# Altium PCB SLT_4U_PEE_V100.PcbDoc (part 1 of 7)
Units mm, origin at the board's own origin, x right, y up, seen from the top; angles counter-clockwise.
Board outline 180 x 80 mm, 6 copper layers (L1 TOP, L2 GND 1, L3 SIGNAL, L4 PWR, L5 GND 2, L6 BOT), stack 1.536 mm thick; 1123 components, 840 nets, 3813 pads, 351 vias.
Unrouted connection lines stored in the file: 2064.
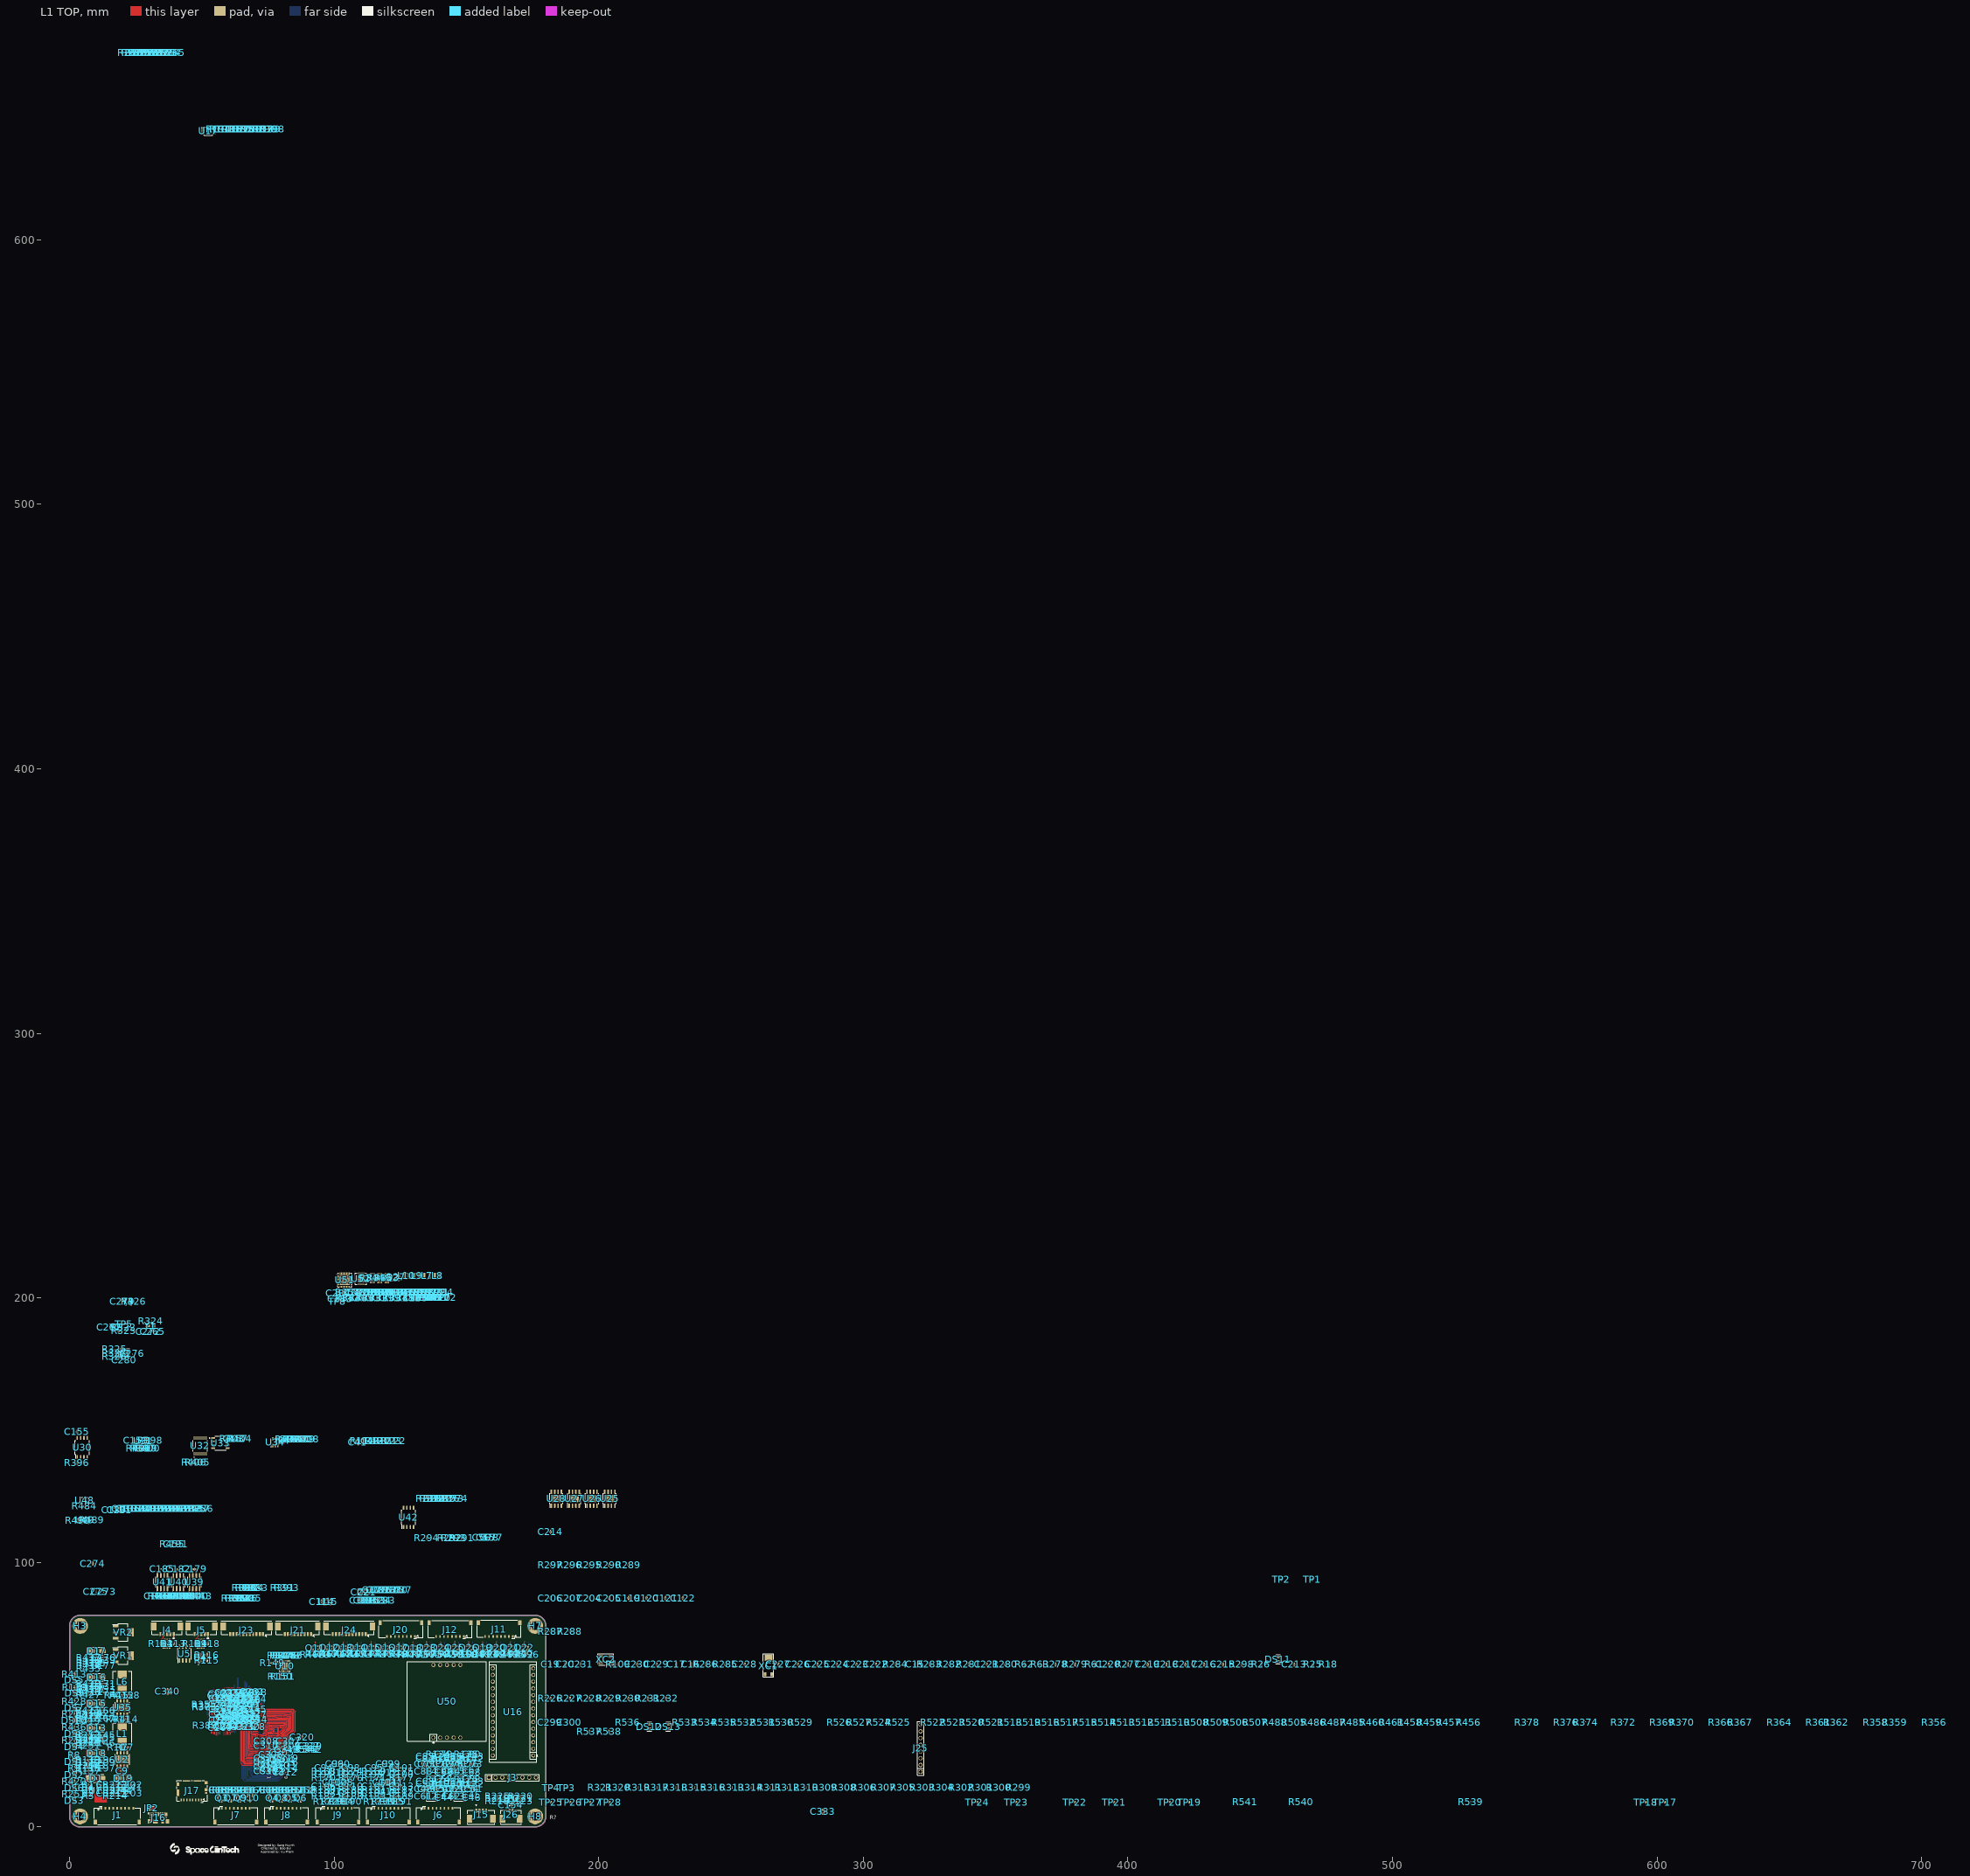
[diagram p0: L1 TOP view]
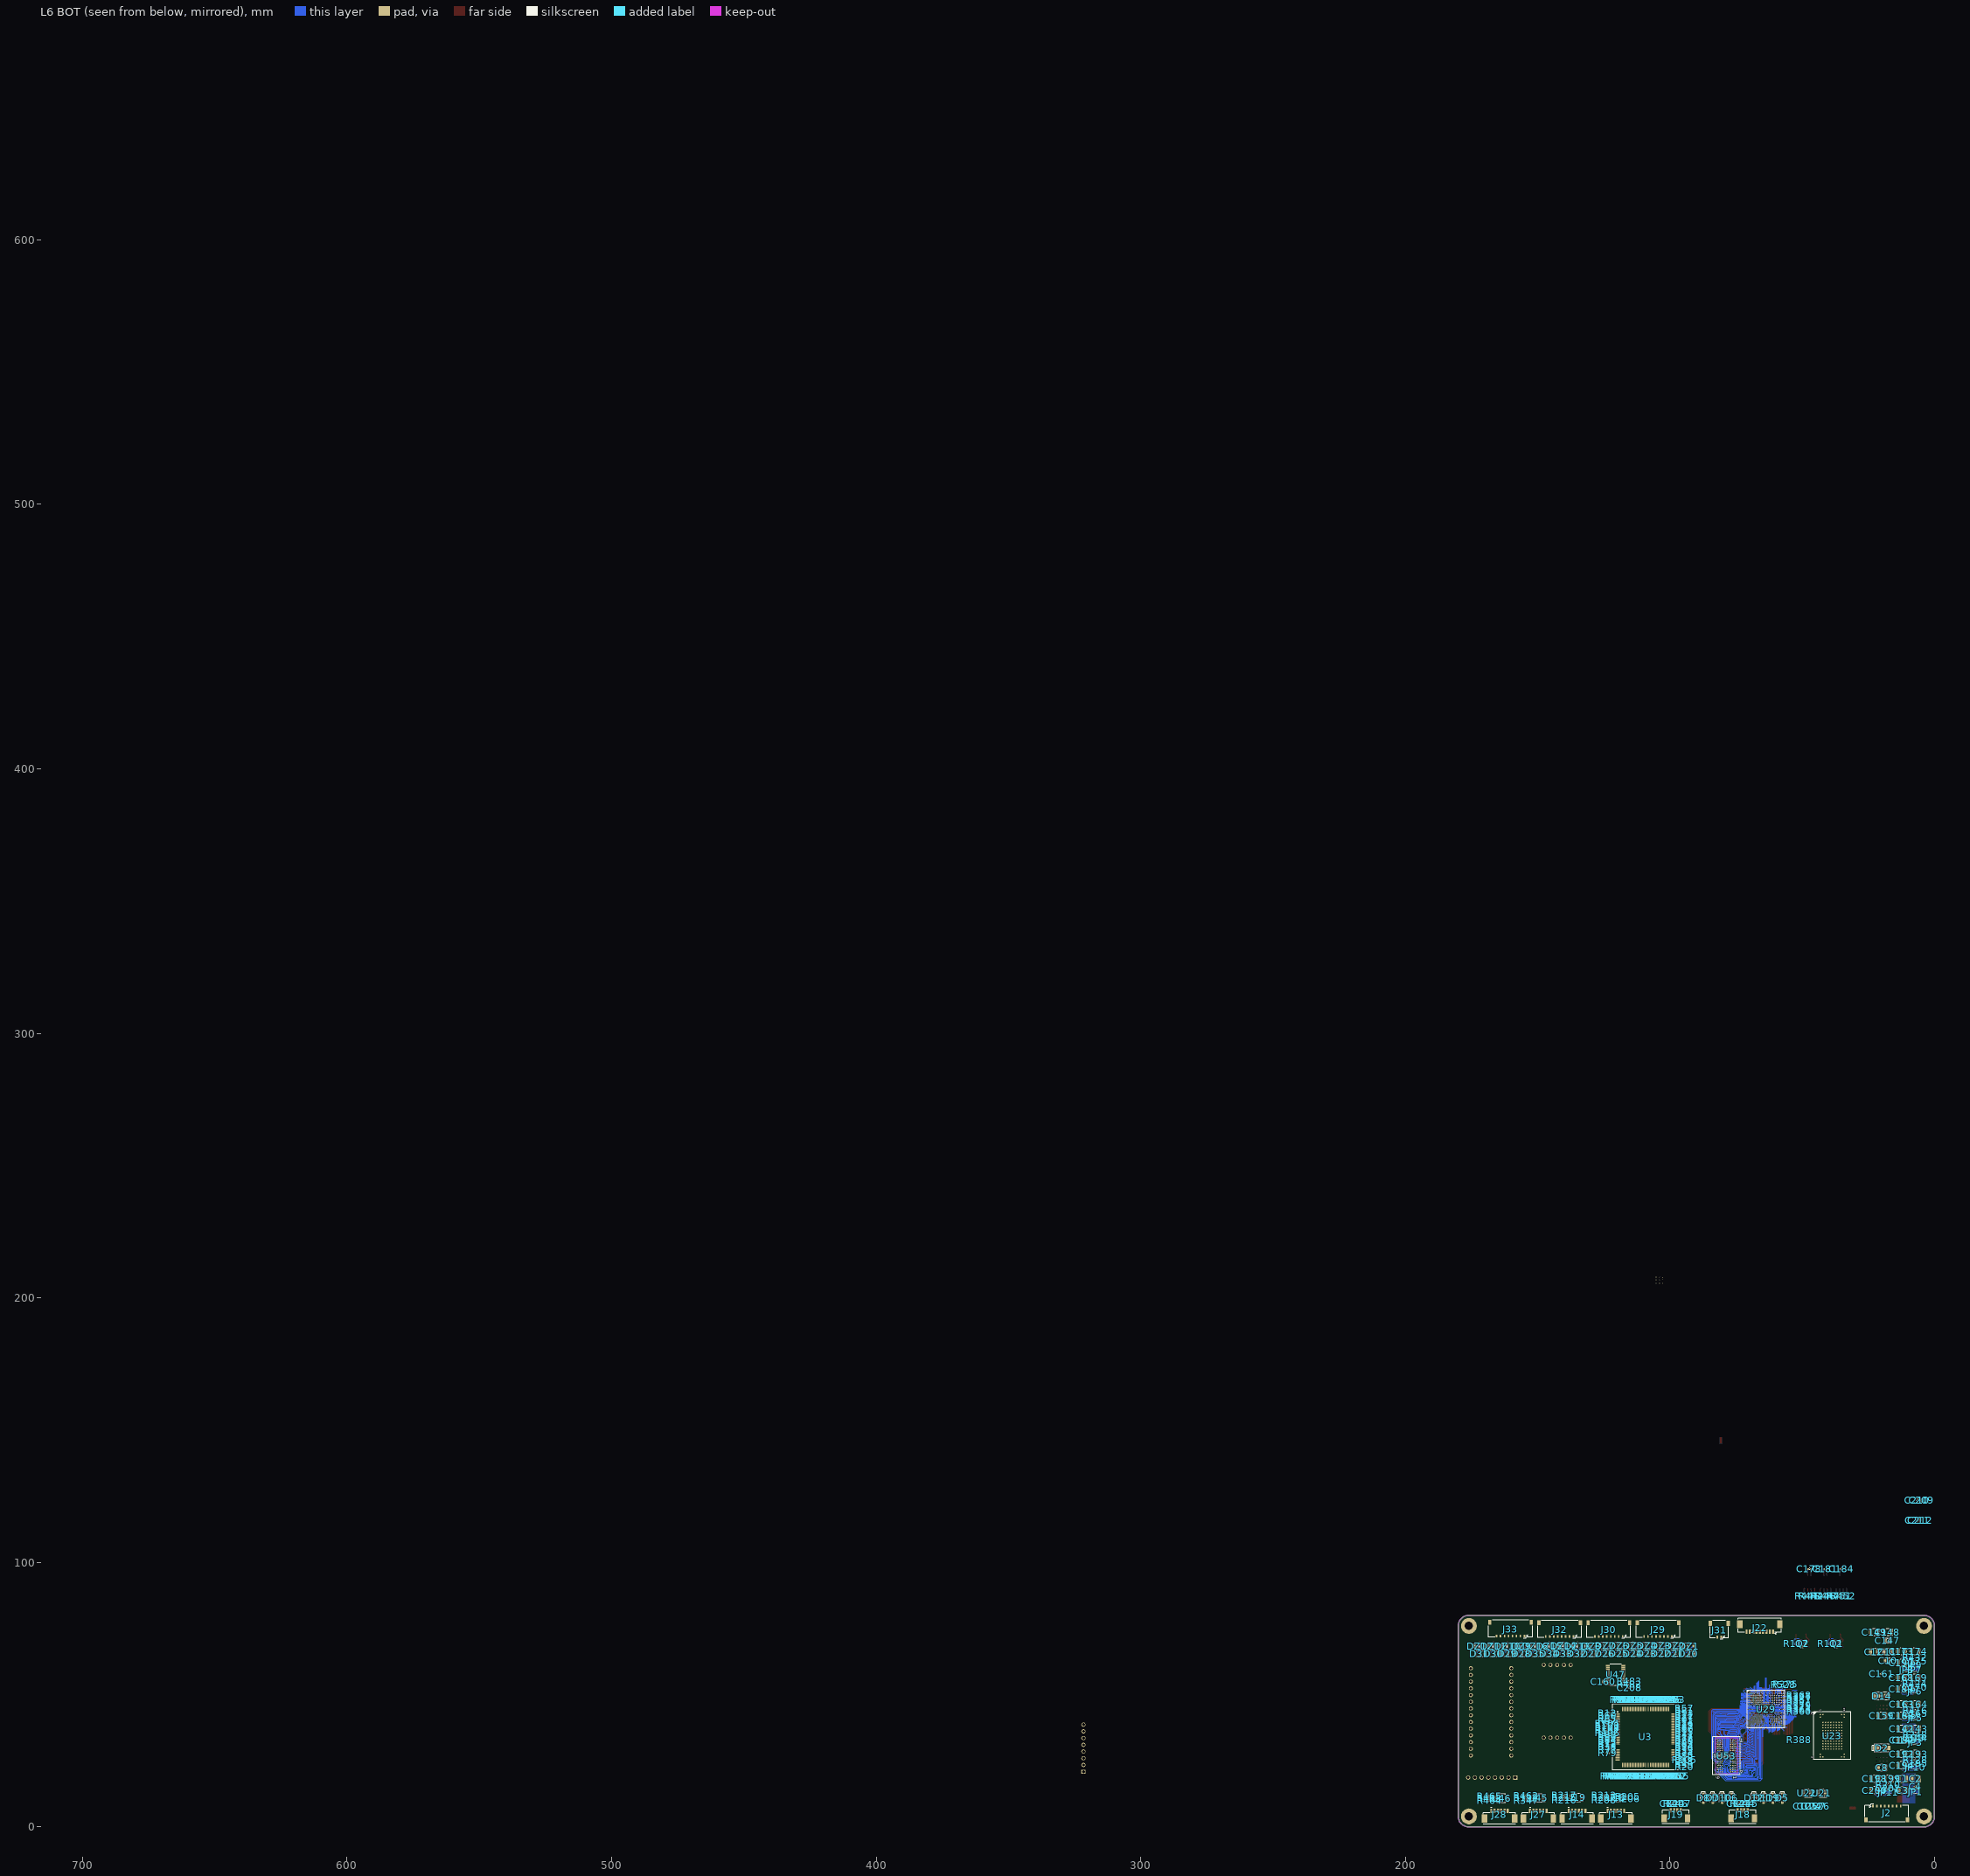
[diagram p1: L6 BOT view, seen from below]
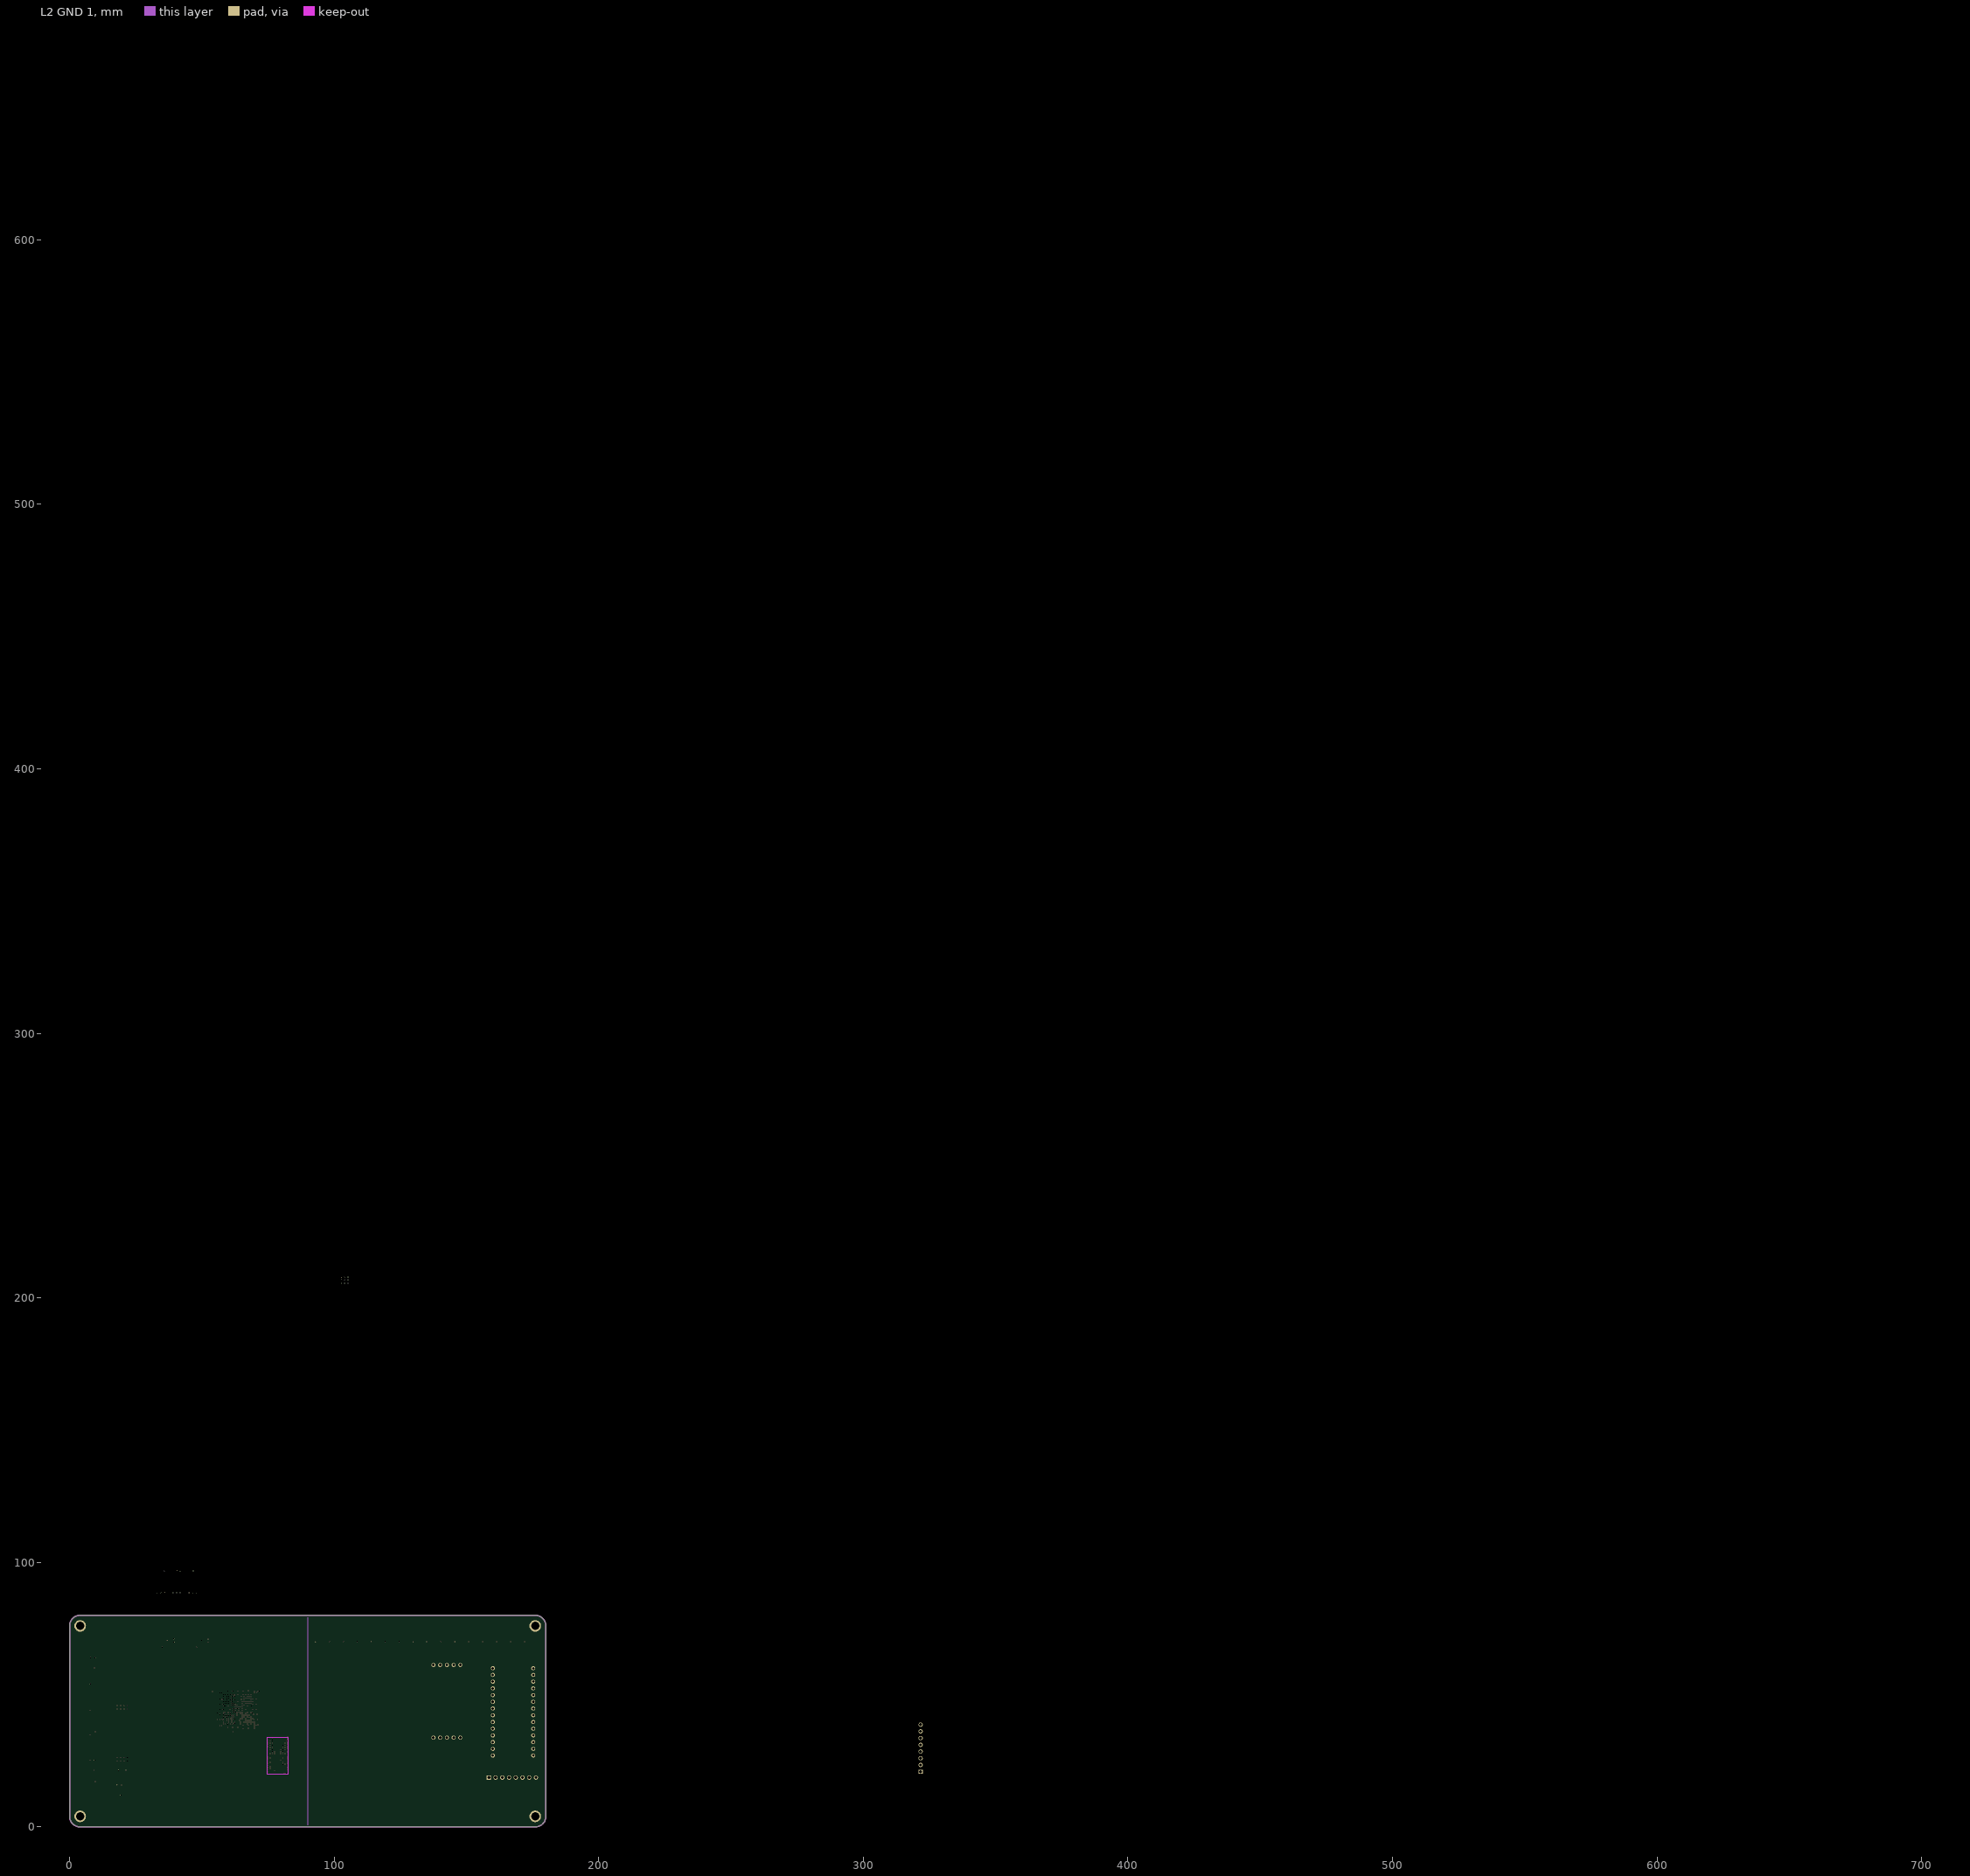
[diagram p2: L2 GND 1]

## Layer stack, top to bottom
Top Solder: solder mask 0.012, Solder Resist, Dk 4.3
L1 TOP: signal copper 0.018
Dielectric 4: core 0.1, PP-006, Dk 4.8
L2 GND 1: signal copper 0.035
Dielectric 2: prepreg 0.11, PP-006, Dk 4.1
L3 SIGNAL: signal copper 0.035
Dielectric 1: dielectric 0.94, FR-4, Dk 4.2
L4 PWR: signal copper 0.035
Dielectric 3: prepreg 0.11, PP-006, Dk 4.1
L5 GND 2: signal copper 0.035
Dielectric 5: core 0.1, PP-006, Dk 4.8
L6 BOT: signal copper 0.018
Bottom Solder: solder mask 0.012, Solder Resist, Dk 4.3

## Board outline
0,4 0,76 cw(c4,76) 4,80 176,80 cw(c176,76) 180,76 180,4 cw(c176,4) 176,0 4,0 cw(c4,4)

## Design rules (kind name [scope] priority, off if disabled: settings)
BoardOutlineClearance [All] p1: gap=0.2 ignorepadtopadclearanceinfootprint=FALSE
Clearance Clearance_HD [InNetClass('HD')] p1: gap=0.6 ignorepadtopadclearanceinfootprint=FALSE
Clearance Clearance_KEEPOUT [IsKeepOut] p2: gap=0 ignorepadtopadclearanceinfootprint=FALSE
Clearance Clearance_SOM [(WithinRoom('ROOM_SOM_1')  OR WithinRoom('ROOM_SOM_2') OR WithinRoom('ROOM_USB_2'))and OnTopLayer and not InAnyDifferentialPair] p3 off: gap=0.1 ignorepadtopadclearanceinfootprint=FALSE except(0.2: SMDPad-Fill SMDPad-Poly SMDPad-Region THPad-Fill THPad-Poly THPad-Region)
Clearance [All] p4: gap=0.1 ignorepadtopadclearanceinfootprint=FALSE except(0.125: Arc-Arc Arc-Track Track-Track Track-Via; 0.15: Arc-Fill Arc-Poly Arc-Region Track-Fill Track-Poly Track-Region SMDPad-Fill Via-Fill Via-Poly Via-Region Fill-Fill Fill-Poly Fill-Region Poly-Poly Poly-Region Region-Region; 0.2: SMDPad-Poly SMDPad-Region THPad-Fill THPad-Poly THPad-Region)
ComponentClearance [All] p1: gap=0.1 collisioncheckmode=3 verticalgap=0 showdistances=FALSE
DiffPairsRouting DiffPairs_100 [InDifferentialPairClass('DIFF100')] p1: maxlimit=0.24 minlimit=0.15 mostfreqgap=0.25 toplayer_maxgap=0.15 toplayer_prefgap=0.16 toplayer_minwidth=0.18 toplayer_maxwidth=0.18 toplayer_prefwidth=0.13 midlayer2_mingap=0.18 midlayer2_maxgap=0.18 midlayer2_minwidth=0.16 midlayer2_maxwidth=0.16 midlayer2_prefwidth=0.1 midlayer3_mingap=0.18 midlayer3_maxgap=0.18 midlayer3_minwidth=0.16 midlayer3_maxwidth=0.16 midlayer3_prefwidth=0.1 bottomlayer_maxgap=0.15 bottomlayer_prefgap=0.16 bottomlayer_minwidth=0.18 bottomlayer_maxwidth=0.18 bottomlayer_prefwidth=0.13 impedanceprofiledriven=TRUE impedanceprofileid={7DCAE575-E62E-4FB4-830B-AD6A277E48F7} impedanceprofilevalue=100.000000 filterlayerstackid={D54526CB-8AD5-485F-8D58-B8B2ED083D53} maxuncoupledlength=12.7
DiffPairsRouting DiffPairs_90 [InDifferentialPairClass('DIFF90')] p2: maxlimit=0.16 minlimit=0.15 mostfreqgap=0.16 toplayer_maxgap=0.15 toplayer_minwidth=0.22 toplayer_maxwidth=0.22 toplayer_prefwidth=0.15 midlayer2_mingap=0.16 midlayer2_minwidth=0.2 midlayer2_maxwidth=0.2 midlayer2_prefwidth=0.1 midlayer3_mingap=0.16 midlayer3_minwidth=0.2 midlayer3_maxwidth=0.2 midlayer3_prefwidth=0.1 bottomlayer_maxgap=0.15 bottomlayer_minwidth=0.22 bottomlayer_maxwidth=0.22 bottomlayer_prefwidth=0.15 impedanceprofiledriven=TRUE impedanceprofileid={482B14A7-7A58-4C4E-B4EF-1ACECD4C47D5} impedanceprofilevalue=90.000000 filterlayerstackid={D54526CB-8AD5-485F-8D58-B8B2ED083D53} maxuncoupledlength=50
FanoutControl Fanout_Small [(CompPinCount < 5)] p4: bgadir=Out bgaviamode=Closest fanoutstyle=Auto fanoutdirection=OutOnly viagrid=0.025 // Fanout_Small (Default Rule)
FanoutControl Fanout_Default [All] p5: bgadir=Out bgaviamode=Centered fanoutstyle=Auto fanoutdirection=OutOnly viagrid=0.025 // Fanout_Default (Default Rule)
HoleSize [All] p1: absolutevalues=TRUE maxlimit=5 minlimit=0.025 maxpercent=80.000 minpercent=20.000
MatchedLengths "Schematic Matched Net Lengths_7" [InNetClass('DDR-ADDR-CTL')] p1: tolerance=0.254 checknetsindiffpair=FALSE checkdiffpairvsdiffpair=TRUE checkxsignals=TRUE checkothers=TRUE
MatchedLengths "Schematic Matched Net Lengths_6" [InNetClass('DDR-LANE1')] p2: tolerance=0.254 checknetsindiffpair=FALSE checkdiffpairvsdiffpair=TRUE checkxsignals=TRUE checkothers=TRUE
MatchedLengths "Schematic Matched Net Lengths_5" [InNetClass('DDR-LANE0')] p3: tolerance=0.254 checknetsindiffpair=FALSE checkdiffpairvsdiffpair=TRUE checkxsignals=TRUE checkothers=TRUE
MatchedLengths "Schematic Matched Net Lengths_4" [InDifferentialPairClass('DIFF100')] p4: tolerance=0.102 checknetsindiffpair=TRUE checkdiffpairvsdiffpair=FALSE checkxsignals=FALSE checkothers=FALSE
MatchedLengths CSI [InxSignalClass('xSignals_CSI')] p5: tolerance=25.4 checknetsindiffpair=FALSE checkdiffpairvsdiffpair=TRUE checkxsignals=TRUE checkothers=TRUE usedelayunits=TRUE delaytolerance=5.000000
MatchedLengths DIFF_PAIR [InDifferentialPairClass('All Differential Pairs')] p6: tolerance=25.4 checknetsindiffpair=TRUE checkdiffpairvsdiffpair=FALSE checkxsignals=FALSE checkothers=FALSE usedelayunits=TRUE delaytolerance=6.000000
MinimumSolderMaskSliver [All] p1: minsoldermaskwidth=0.12
PlaneConnect PlaneConnect_1 [InNet('GND') and IsVia] p1: planeconnectstyle=Direct reliefexpansion=0.508 reliefentries=4 reliefconductorwidth=0.254 reliefairgap=0.254
PlaneConnect [not(InNet('GND') and IsVIA)] p2: planeconnectstyle=Relief reliefexpansion=0.508 reliefentries=4 reliefconductorwidth=0.254 reliefairgap=0.254
PolygonConnect PolygonConnect_1 [(InNet('+5V_USB-Adaptor') OR InNet('+3V3_CM4') OR InNet('+5V_AUX-Adaptor'))] p1: connectstyle=Direct reliefconductorwidth=0.254 reliefentries=4 polygonreliefangle="90 Angle" airgapwidth=0.254
PolygonConnect [NOT (InComponent('U4') OR InComponent('U7'))] p2: thpad.connectstyle=Relief thpad.reliefconductorwidth=0.4 thpad.reliefentries=4 thpad.polygonreliefangle="90 Angle" thpad.airgapwidth=0.254 thpad.conductorbypadedge=TRUE thpad.mindistance=0.381 thpad.enablemindistance=FALSE smdpad.connectstyle=Relief smdpad.reliefconductorwidth=0.2 smdpad.reliefentries=4 smdpad.polygonreliefangle="90 Angle" smdpad.airgapwidth=0.15 smdpad.conductorbypadedge=TRUE smdpad.mindistance=0.381 smdpad.enablemindistance=FALSE via.connectstyle=Direct via.reliefconductorwidth=0.2 via.reliefentries=4 via.polygonreliefangle="90 Angle" via.airgapwidth=0.254
RoutingVias [All] p1: holewidth=0.2 width=0.4 viastyle="Through Hole" minholewidth=0.2 minwidth=0.4 maxholewidth=1 maxwidth=2
SilkToSilkClearance [All] p1: silktosilkclearance=0.125
SilkToSolderMaskClearance [IsPad] p1: minsilkscreentomaskgap=0.1 clearancetoexposedcopper=TRUE
SolderMaskExpansion [All] p1: expansion=0.102 istentingtop=FALSE
Width [All] p1: maxlimit=2 minlimit=0.1 preferedwidth=0.15
21 further rules are at their usual default settings.

## Classes and differential pairs
component class 19_SOLEDNOID_2: C160 C208 D20 D21 D22 D23 D24 D25 D26 D27 D28 D29 D30 D31 D32 D33 D34 D35 DZ1 DZ2 DZ3 DZ4 DZ5 DZ6 DZ7 DZ8 DZ9 DZ10 DZ11 DZ12 DZ13 DZ14 DZ15 DZ16 J29 J30 J32 J33 Q11 Q12 Q13 Q14 Q15 Q16 Q17 Q18 Q19 Q20 Q21 Q22 Q23 Q24 Q25 Q26 R201 R202 R466 R467 R468 R469 R470 R471 R472 R473 R474 R475 R476 R477 R478 R479 R480 R481 R482 R483 R491 R492 R493 R494 R495 R496 R497 R498 R499 R500 R501 R502 R503 R504 U47
component class 19_SOLEDNOID_1: J20 R257 R258 R259 R260 R261 R262 R263 R264 R265 R266 R267 R268 U25 U26 U27 U28
component class 18_HD4_PUMP: C115 C116 C117 C118 J11 J12 R193 R194 R195 R196 R197 R198 R199 R200 R203 U16 U17
component class 18_HD4_PUMP_2: C214 J31 U50
component class 17_I2C_Sensor_OnBoard: C209 C210 C211 C212 R289 R290 R295 R296 R297 R484 R489 R490 U48 U49
component class 17_FLOW_Sensor: C119 C120 C121 C122 C123 C204 C205 C206 C207 J13 J14 J15 J27 J28 R192 R205 R206 R207 R208 R213 R215 R216 R217 R218 R219 R220 R221 R225 R347 R462 R463 R464 R465 U18 U19 U20 U45 U46
component class 16_TEC: C43 C44 C45 C46 C47 C48 C49 C50 C51 C52 C53 C54 C55 C56 C57 C58 C59 C60 C61 C62 C63 C64 C65 C66 C67 C68 C69 C70 C71 C72 C73 C74 C75 C76 C77 C78 C79 C80 C81 C82 C83 C84 C85 C86 C87 J6 L2 L3 L4 L5 R124 R125 R130 R132 R134 R135 R140 R142 R144 R145 R146 R147 R148 R149 U6 U7 U8 U9 U10
component class 15_HEATER: C88 C89 D5 D6 D7 D8 D9 D10 D11 D12 J7 J8 Q3 Q4 Q5 Q6 Q7 Q8 Q9 Q10 R152 R153 R154 R155 R156 R157 R158 R159 R160 R161 R162 R163 R164 R165 R166 R167
component class 14_NTC_TEMPSENSOR: C90 C91 C92 C93 C94 C95 C96 C97 C98 C99 C100 C101 C102 C103 C104 C105 C106 C107 C108 C109 C110 C111 C112 C113 C114 J9 J10 R168 R169 R170 R171 R172 R173 R174 R175 R176 R177 R178 R179 R180 R181 R182 R183 R184 R185 R186 R187 R188 R189 R190 R191 U11 U12 U13 U14 U15
component class 13_MRAM_RTC_WDT: C153 C154 C155 C156 C157 J26 JP4 R287 R288 R396 R397 R398 R399 R400 R401 R402 R403 R404 R405 R406 R407 R408 R409 R410 U30 U31 U32 U33 U34
component class 12_CONSOLE: C140 C141 J18 J19 R244 R245 R246 R247
component class 11_MCU: C15 C16 C17 C18 C19 C20 C21 C22 C23 C24 C25 C26 C27 C28 C29 C30 C31 C32 C33 C34 C35 C36 C37 C38 C39 C213 C215 C216 C217 C218 C219 C220 C221 C222 C223 C224 C225 C226 C227 C228 C229 C230 C231 DS11 J3 R11 R12 R13 R14 R15 R16 R17 R18 R19 R20 R21 R22 R23 R24 R25 R26 R27 R28 R29 R30 R31 R32 R33 R34 R35 R36 R37 R38 R39 R40 R41 R42 R43 R44 R45 R46 R47 R48 R49 R50 R51 R52 R53 R54 R55 R56 R57 R58 R59 R60 R61 R62 R63 R64 R65 R66 R67 R68 R69 R70 R71 R72 R73 R74 R75 R76 R77 R78 R79 R80 R81 R82 R83 R84 R85 R86 R87 R88 R89 R90 R91 R92 R93 R94 R95 R96 R97 R98 R99 R100 R101 R102 R103 R104 R105 R106 R107 R108 R109 R110 R126 R127 R131 R133 R141 R143 R150 R151 R277 R278 R279 R280 R281 R282 R283 R284 R285 R286 R298 TP1 TP2 U3 XC1 XC2
component class 10_USB: C40 C41 C42 D3 D4 J4 J5 Q1 Q2 R111 R112 R113 R114 R115 R116 R117 R118 R119 R120 R121 R122 R123 U4 U5
component class 09_eMMC: C128 C129 C130 C131 C132 C133 C134 C135 C136 C137 C138 C139 R233 R234 R235 R236 R237 R238 R239 R240 R241 R242 R243 U23
component class 08_SOM_USB_CARD: C124 C125 C126 C127 C191 J16 J17 JP2 R226 R227 R228 R229 R230 R231 R232 R455 U21 U22 U42
component class 08_SAMA7G54-PMIC: C281 C282 C283 C284 C285 C286 C287 C288 C289 C290 C291 C292 C293 C294 C295 C296 C297 C298 L7 L8 L9 L10 Q27 R329 R330 R331 R333 R335 R336 R337 R338 R339 R340 R342 R343 R344 R345 R346 R348 R349 R350 R351 R352 R353 R354 TP6 TP7 TP8 TP9 TP10 TP11 TP12 TP13 TP14 TP15 TP16 U51 U52
component class 08_SAMA7G54-PIO: C299 C300 DS12 DS13 J25 R355 R356 R357 R358 R359 R360 R361 R362 R363 R364 R365 R366 R367 R368 R369 R370 R371 R372 R373 R374 R375 R376 R377 R378 R379 R380 R381 R382 R383 R384 R385 R386 R388 R389 R390 R391 R393 R394 R395 R456 R457 R458 R459 R460 R461 R485 R486 R487 R488 R505 R506 R507 R508 R509 R510 R511 R512 R513 R514 R515 R516 R517 R518 R519 R520 R521 R522 R523 R524 R525 R526 R527 R528 R529 R530 R531 R532 R533 R534 R535 R536 R537 R538 U29
component class 08_SAMA7G54-MPU: C150 C151 C152 C232 C233 C234 C235 C236 C237 C238 C239 C240 C241 C242 C243 C244 C245 C246 C247 C248 C249 C250 C251 C252 C253 C254 C255 C256 C257 C258 C259 C260 C261 C262 C263 C264 C265 C266 C267 C268 C269 C270 C271 C272 C273 C274 C275 C276 C277 C278 C279 C280 R299 R300 R301 R302 R303 R304 R305 R306 R307 R308 R309 R310 R311 R312 R313 R314 R315 R316 R317 R318 R319 R320 R321 R322 R323 R324 R325 R326 R327 R328 R? TP3 TP4 TP5 Y1 Y2 Y3 Y4
component class 08_SAMA7G54-DDR3: C301 C302 C303 C304 C305 C306 C307 C308 C309 C310 C311 C312 C313 C314 C315 C316 C317 C318 C319 C320 C321 C322 C323 C324 C325 C326 C327 C328 C329 C330 C331 C332 C333 C334 C335 C336 C337 C338 C339 C340 C341 C342 R539 R540 R541 R542 R543 TP17 TP18 TP19 TP20 TP21 TP22 TP23 TP24 TP25 TP26 TP27 TP28 U53
component class 07_CAN: C178 C179 C180 C181 C182 C183 C184 C185 C186 R440 R441 R442 R443 R444 R445 R446 R447 R448 R449 R450 R451 R452 R453 R454 U39 U40 U41
component class 06_POWER_5: C192 C193 C194 C195 C196 C197 C198 C199 C200 C201 C202 C203 D18 D19 DS9 DS10 JP10 JP11 R128 R129 R136 R137 R138 R139 R204 R209 R210 R211 R212 R214 R222 R223 R224 R341 U43 U44
component class 06_POWER_4: C168 C169 C170 C171 C172 C173 C174 C175 C176 C177 C189 C190 D16 D17 DS7 DS8 JP6 JP7 JP8 JP9 R424 R425 R426 R427 R428 R429 R430 R431 R432 R433 R434 R435 R436 R437 R438 R439 U37 U38
component class 06_POWER_3: C158 C159 C161 C162 C163 C164 C165 C166 C167 C188 D14 D15 DS5 DS6 JP5 L6 R411 R412 R413 R414 R415 R416 R417 R418 R419 R420 R421 R422 R423 U35 U36
component class 06_POWER_2: C142 C143 C144 C145 C146 C147 C148 C149 C187 D13 DS3 DS4 JP3 R248 R249 R250 R251 R252 R253 R254 R255 R256 U24 VR2
component class 06_POWER_1: C1 C2 C3 C4 C5 C6 C7 C8 C9 C10 C11 C12 C13 C14 D1 D2 DS1 DS2 JP1 L1 R1 R2 R3 R4 R5 R6 R7 R8 R9 R10 U1 U2 VR1
component class 05_CONNECTOR_OUT: J21 J22 J23 J24 R269 R270 R271 R272 R273 R274 R275 R276 R291 R292 R293 R294
component class 05_CONNECTOR_IN: J1 J2
net class DIFF90: USBA_N USBA_P USBB_N USBB_P USBC_N USBC_P
net class DDR-LANE1: DDR_D8 DDR_D9 DDR_D10 DDR_D11 DDR_D12 DDR_D13 DDR_D14 DDR_D15 DDR_DQM1 DDR_DQS1_N DDR_DQS1_P
net class DDR-LANE0: DDR_D0 DDR_D1 DDR_D2 DDR_D3 DDR_D4 DDR_D5 DDR_D6 DDR_D7 DDR_DQM0 DDR_DQS0_N DDR_DQS0_P
net class DDR-ADDR-CTL: DDR_A0 DDR_A1 DDR_A2 DDR_A3 DDR_A4 DDR_A5 DDR_A6 DDR_A7 DDR_A8 DDR_A9 DDR_A10 DDR_A11 DDR_A12 DDR_A13 DDR_A14 DDR_A15 DDR_BA0 DDR_BA1 DDR_BA2 DDR_CAS DDR_CK_N DDR_CK_P DDR_CKE DDR_CS DDR_ODT DDR_RAS DDR_WE
net class DIFF100: DDR_CK_N DDR_CK_P DDR_DQS0_N DDR_DQS0_P DDR_DQS1_N DDR_DQS1_P MIPI_CK_N MIPI_CK_P MIPI_D0_N MIPI_D0_P MIPI_D1_N MIPI_D1_P
net class 50_eMMC1_MCU: SOM_SDMMC0_OUT_CK SOM_SDMMC0_OUT_CMD SOM_SDMMC0_OUT_D0 SOM_SDMMC0_OUT_D1 SOM_SDMMC0_OUT_D2 SOM_SDMMC0_OUT_D3 SOM_SDMMC0_OUT_D4 SOM_SDMMC0_OUT_D5 SOM_SDMMC0_OUT_D6 SOM_SDMMC0_OUT_D7
component class MOUTING: H3 H4 H7 H8
net class HD: HD4_CH11+ HD4_CH11- HD4_CH12+ HD4_CH12- HD4_CH21+ HD4_CH21- HD4_CH22+ HD4_CH22- HD4_CH31+ HD4_CH31- HD4_CH32+ HD4_CH32- HD4_CH41+ HD4_CH41- HD4_CH42+ HD4_CH42-
differential pair class DIFF100: CAM1_CK CAM1_D0 CAM1_D1 CAM2_CK CAM2_D0 CAM2_D1 CAM_CK CAM_D0 CAM_D1 DDR_CK DDR_DQS0 DDR_DQS1 L_CAM1_CK L_CAM1_D0 L_CAM1_D1 L_CAM2_CK L_CAM2_D0 L_CAM2_D1 MIPI_CK MIPI_D0 MIPI_D1 SOM_CAM_CK SOM_CAM_D0 SOM_CAM_D1
differential pair class DIFF90: ADT1_USB2.0 ADT1_USB_D ADT2_USB2.0 ADT2_USB_D BOOT_USB_D CONN_USB CONN_USB_1 CONN_USB_1_R CONN_USB_2 CONN_USB_2_R CONN_USB_3 CONN_USB_3_R CONN_USB_4 CONN_USB_4_R CONSOLE_1 CONSOLE_2 CONSOLE_USB SOM_USB SOM_USB_USB2 USB1 USB_D USBA USBB USBC
differential pair USBA: +USBA_P -USBA_N
differential pair IF_SOM_USB: +IF_SOM_USB_P -IF_SOM_USB_N
differential pair SENSE4: +SENSE4_P -SENSE4_N
differential pair SENSE3: +SENSE3_P -SENSE3_N
differential pair SENSE2: +SENSE2_P -SENSE2_N
differential pair SENSE1: +SENSE1_P -SENSE1_N
differential pair MIPI_D1: +MIPI_D1_P -MIPI_D1_N
differential pair MIPI_D0: +MIPI_D0_P -MIPI_D0_N
differential pair MIPI_CK: +MIPI_CK_P -MIPI_CK_N
differential pair DDR_DQS1: +DDR_DQS1_P -DDR_DQS1_N
differential pair DDR_DQS0: +DDR_DQS0_P -DDR_DQS0_N
differential pair DDR_CK: +DDR_CK_P -DDR_CK_N
differential pair USBC: +USBC_P -USBC_N
differential pair USBB: +USBB_P -USBB_N
differential pair SOM_USB: +SOM_USB_P -SOM_USB_N
differential pair SOM_CAM_D1: +SOM_CAM_D1_P -SOM_CAM_D1_N
differential pair SOM_CAM_D0: +SOM_CAM_D0_P -SOM_CAM_D0_N
differential pair SOM_CAM_CK: +SOM_CAM_CK_P -SOM_CAM_CK_N
differential pair CONN_USB_2: +CONN_USB_2_P -CONN_USB_2_N
differential pair CONN_USB_2_R: +CONN_USB_2_R_P -CONN_USB_2_R_N
differential pair CONN_USB_1: +CONN_USB_1_P -CONN_USB_1_N
differential pair CONN_USB_1_R: +CONN_USB_1_R_P -CONN_USB_1_R_N

## Components (designator, comment, footprint, x,y, rotation, side; value= is the part's Value field where it differs from the comment)
C1 "47uF/25V" CAP_C_3225X80 12.192,18.161 r180 bottom
C2 "47uF/25V" CAP_C_3225X80 7.112,18.161 r0 bottom
C3 "47uF/25V" CAP_C_3225X80 12.192,13.843 r180 bottom
C4 "1uF/20V" CAP_C_1005X60#1 7.112,15.24 r0 bottom
C5 "2.2nF/10V" CAP_C_1005X60#1 12.711,15.883 r180 top
C6 "2.2nF/10V" CAP_C_1005X60#1 12.711,12.835 r180 top
C7 "0.01uF/16V" CAP_C_1005X60#1 21.971,30.099 r0 top
C8 "47uF/25V" CAP_C_3225X80 19.939,22.352 r0 bottom
C9 "1uF/20V" CAP_C_1005X60#1 19.939,21.209 r0 top
C10 "10uF/20V" CAP_C_2012X110 17.651,62.895 r0 bottom
C11 "47uF/25V" CAP_C_3225X80 17.725,66.196 r0 bottom
C12 "47uF/25V" CAP_C_3225X80 22.805,66.196 r180 bottom
C13 "1uF/20V" CAP_C_1005X60#1 7.25,33.536 r0 bottom
C14 "47uF/25V" CAP_C_3225X80 12.319,32.774 r180 bottom
C15 "0.1uF/10V" CAP_C_1005X60#2 319.574,61.485 r90 top
C16 "4.7pF/10V" CAP_C_1005X60#2 234.92,61.485 r90 top
C17 "4.7pF/10V" CAP_C_1005X60#2 229.344,61.485 r90 top
C18 "12pF/10V" CAP_C_1005X60#1 115.57,48.133 r270 bottom
C19 "12pF/10V" CAP_C_1005X60#2 181.817,61.485 r90 top
C20 "12pF/10V" CAP_C_1005X60#2 187.392,61.485 r90 top
C21 "10uF/20V" CAP_C_2012X110 112.362,88.826 r270 top
C22 "10uF/20V" CAP_C_2012X110 109.929,88.826 r270 top
C23 "0.1uF/10V" CAP_C_1005X60#1 120.139,89.526 r90 top
C24 "0.1uF/10V" CAP_C_1005X60#1 121.597,89.526 r90 top
C25 "0.1uF/10V" CAP_C_1005X60#1 123.055,89.526 r90 top
C26 "0.1uF/10V" CAP_C_1005X60#1 118.681,89.526 r90 top
C27 "0.1uF/10V" CAP_C_1005X60#1 114.307,89.526 r90 top
C28 "0.1uF/10V" CAP_C_1005X60#1 115.765,89.526 r90 top
C29 "0.1uF/10V" CAP_C_1005X60#1 117.223,89.526 r90 top
C30 "0.1uF/10V" CAP_C_1005X60#1 124.513,89.526 r90 top
C31 "0.1uF/10V" CAP_C_1005X60#1 116.731,85.568 r90 top
C32 "0.1uF/10V" CAP_C_1005X60#1 115.273,85.568 r90 top
C33 "0.1uF/10V" CAP_C_1005X60#1 119.647,85.568 r90 top
C34 "0.1uF/10V" CAP_C_1005X60#1 118.189,85.568 r90 top
C35 "0.1uF/10V" CAP_C_1005X60#1 113.815,85.568 r90 top
C36 "0.1uF/10V" CAP_C_1005X60#1 109.441,85.568 r90 top
C37 "0.1uF/10V" CAP_C_1005X60#1 125.971,89.526 r90 top
C38 "0.1uF/10V" CAP_C_1005X60#1 112.357,85.568 r90 top
C39 "0.1uF/10V" CAP_C_1005X60#1 110.899,85.568 r90 top
C40 "0.1uF/10V" CAP_C_1005X60#1 113.704,145.914 r90 top
C41 "4.7uF/10V" CAP_C_1608X80#1 109.042,145.514 r90 top
C42 "0.1uF/10V" CAP_C_1005X60#1 115.162,145.914 r90 top
C43 "47nF/10V" CAP_C_1005X60#1 141.605,12.084 r180 top
C44 "47nF/10V" CAP_C_1005X60#1 141.605,11.195 r180 top
C45 "47nF/10V" CAP_C_1005X60#1 152.146,12.084 r180 top
C46 "47nF/10V" CAP_C_1005X60#1 152.146,11.195 r180 top
C47 "4.7uF/10V" CAP_C_1608X80#1 142.24,14.37 r90 top
C48 "4.7uF/10V" CAP_C_1608X80#1 133.985,14.37 r90 top
C49 "0.1uF/10V" CAP_C_1005X60#1 135.255,14.37 r90 top
C50 "0.1uF/10V" CAP_C_1005X60#1 140.97,14.37 r90 top
C51 "4.7uF/10V" CAP_C_1608X80#1 152.781,14.37 r90 top
C52 "4.7uF/10V" CAP_C_1608X80#1 144.526,14.37 r90 top
C53 "0.1uF/10V" CAP_C_1005X60#1 145.796,14.37 r90 top
C54 "0.1uF/10V" CAP_C_1005X60#1 151.511,14.37 r90 top
C55 "47nF/10V" CAP_C_1005X60#1 157.381,109.356 r90 top
C56 "47nF/10V" CAP_C_1005X60#1 155.923,109.356 r90 top
C57 "0.1uF/10V" CAP_C_1005X60#1 141.576,18.013 r180 top
C58 "0.1uF/10V" CAP_C_1005X60#1 152.117,18.013 r180 top
C59 "0.1uF/10V" CAP_C_1005X60#1 134.62,16.275 r0 top
C60 "0.1uF/10V" CAP_C_1005X60#1 145.161,16.275 r0 top
C61 "1uF/10V" CAP_C_1005X60#1 133.985,11.576 r270 top
C62 "1uF/10V" CAP_C_1005X60#1 144.526,11.576 r270 top
C63 "1uF/10V" CAP_C_1005X60#1 134.62,17.164 r0 top
C64 "1uF/10V" CAP_C_1005X60#1 145.161,17.164 r0 top
C65 "47nF/10V" CAP_C_1005X60#1 141.605,21.59 r180 top
C66 "47nF/10V" CAP_C_1005X60#1 141.605,20.701 r180 top
C67 "47nF/10V" CAP_C_1005X60#1 152.146,21.59 r180 top
C68 "47nF/10V" CAP_C_1005X60#1 152.146,20.701 r180 top
C69 "4.7uF/10V" CAP_C_1608X80#1 142.24,23.876 r90 top
C70 "4.7uF/10V" CAP_C_1608X80#1 133.985,23.876 r90 top
C71 "0.1uF/10V" CAP_C_1005X60#1 135.255,23.876 r90 top
C72 "0.1uF/10V" CAP_C_1005X60#1 140.97,23.876 r90 top
C73 "4.7uF/10V" CAP_C_1608X80#1 152.781,23.876 r90 top
C74 "4.7uF/10V" CAP_C_1608X80#1 144.526,23.876 r90 top
C75 "0.1uF/10V" CAP_C_1005X60#1 145.796,23.876 r90 top
C76 "0.1uF/10V" CAP_C_1005X60#1 151.511,23.876 r90 top
C77 "47nF/10V" CAP_C_1005X60#1 160.297,109.356 r90 top
C78 "47nF/10V" CAP_C_1005X60#1 158.839,109.356 r90 top
C79 "0.1uF/10V" CAP_C_1005X60#1 141.576,27.519 r180 top
C80 "0.1uF/10V" CAP_C_1005X60#1 152.117,27.519 r180 top
C81 "0.1uF/10V" CAP_C_1005X60#1 134.62,25.781 r0 top
C82 "0.1uF/10V" CAP_C_1005X60#1 145.161,25.781 r0 top
C83 "1uF/10V" CAP_C_1005X60#1 133.985,21.082 r270 top
C84 "1uF/10V" CAP_C_1005X60#1 144.526,21.082 r270 top
C85 "1uF/10V" CAP_C_1005X60#1 134.62,26.67 r0 top
C86 "1uF/10V" CAP_C_1005X60#1 145.161,26.67 r0 top
C87 "0.1uF/10V" CAP_C_1005X60#1 84.582,64.77 r90 top
C88 "1uF/20V" CAP_C_1005X60#1 56.261,13.97 r270 top
C89 "1uF/20V" CAP_C_1005X60#1 75.438,13.97 r270 top
C90 "1uF/20V" CAP_C_1005X60#1 102.616,23.851 r180 top
C91 "0.1uF/10V" CAP_C_1005X60#1 96.266,19.832 r0 top
C92 "1uF/20V" CAP_C_1005X60#1 119.38,23.851 r0 top
C93 "0.1uF/10V" CAP_C_1005X60#1 115.316,19.832 r0 top
C94 "0.1uF/10V" CAP_C_1005X60#1 96.266,22.372 r180 top
C95 "0.1uF/10V" CAP_C_1005X60#1 115.316,22.372 r180 top
C96 "0.1uF/10V" CAP_C_1005X60#1 100.33,23.851 r0 top
C97 "0.1uF/10V" CAP_C_1005X60#1 106.553,19.832 r180 top
C98 "0.1uF/10V" CAP_C_1005X60#1 106.553,22.372 r0 top
C99 "0.1uF/10V" CAP_C_1005X60#1 121.666,23.851 r180 top
C100 "0.1uF/10V" CAP_C_1005X60#1 125.603,19.832 r180 top
C101 "0.1uF/10V" CAP_C_1005X60#1 125.603,22.372 r0 top
C102 "1uF/20V" CAP_C_1005X60#1 100.33,16.891 r0 top
C103 "0.1uF/10V" CAP_C_1005X60#1 96.266,12.831 r0 top
C104 "1uF/20V" CAP_C_1005X60#1 119.38,16.891 r0 top
C105 "0.1uF/10V" CAP_C_1005X60#1 115.316,12.831 r0 top
C106 "0.1uF/10V" CAP_C_1005X60#1 96.266,15.371 r180 top
C107 "0.1uF/10V" CAP_C_1005X60#1 115.316,15.371 r180 top
C108 "0.1uF/10V" CAP_C_1005X60#1 102.616,16.891 r180 top
C109 "0.1uF/10V" CAP_C_1005X60#1 106.553,12.831 r180 top
C110 "0.1uF/10V" CAP_C_1005X60#1 106.553,15.371 r0 top
C111 "0.1uF/10V" CAP_C_1005X60#1 121.666,16.891 r180 top
C112 "0.1uF/10V" CAP_C_1005X60#1 125.603,12.831 r180 top
C113 "0.1uF/10V" CAP_C_1005X60#1 125.603,15.371 r0 top
C114 "0.1uF/10V" CAP_C_1005X60#1 95.377,85.217 r270 top
C115 "0.1uF/10V" CAP_C_1005X60#1 60.727,641.849 r90 top
C116 "0.1uF/10V" CAP_C_1005X60#1 59.269,641.849 r90 top
C117 "0.1uF/10V" CAP_C_1005X60#1 63.643,641.849 r90 top
C118 "0.1uF/10V" CAP_C_1005X60#1 62.185,641.849 r90 top
C119 "0.1uF/10V" CAP_C_1005X60#2 211.294,86.512 r90 top
C120 "0.1uF/10V" CAP_C_1005X60#2 218.144,86.512 r90 top
C121 "0.1uF/10V" CAP_C_1005X60#2 225.244,86.512 r90 top
C122 "0.1uF/10V" CAP_C_1005X60#2 231.87,86.512 r90 top
C123 "0.1uF/10V" CAP_C_1005X60#1 170.561,9.878 r180 top
C124 "0.1uF/10V" CAP_C_1005X60#1 47.174,7.865 r90 bottom
C125 "0.1uF/10V" CAP_C_1005X60#1 48.632,7.865 r90 bottom
C126 "1uF/10V" CAP_C_1005X60#1 44.258,7.865 r90 bottom
C127 "0.1uF/10V" CAP_C_1005X60#1 45.716,7.865 r90 bottom
C128 "1uF/20V" CAP_C_1005X60#1 29.451,120.266 r90 top
C129 "0.1uF/10V" CAP_C_1005X60#1 27.993,120.266 r90 top
C130 "4.7uF/10V" CAP_C_1608X80#1 16.925,119.866 r90 top
C131 "4.7uF/10V" CAP_C_1608X80#1 18.958,119.866 r90 top
C132 "0.1uF/10V" CAP_C_1005X60#1 32.367,120.266 r90 top
C133 "0.1uF/10V" CAP_C_1005X60#1 30.909,120.266 r90 top
C134 "0.1uF/10V" CAP_C_1005X60#1 26.535,120.266 r90 top
C135 "0.1uF/10V" CAP_C_1005X60#1 22.161,120.266 r90 top
C136 "0.1uF/10V" CAP_C_1005X60#1 20.703,120.266 r90 top
C137 "0.1uF/10V" CAP_C_1005X60#1 23.619,120.266 r90 top
C138 "0.1uF/10V" CAP_C_1005X60#1 25.077,120.266 r90 top
C139 "0.1uF/10V" CAP_C_1005X60#1 33.825,120.266 r90 top
C140 "0.1uF/10V" CAP_C_1005X60#1 99.06,8.763 r270 bottom
C141 "0.1uF/10V" CAP_C_1005X60#1 73.787,8.763 r270 bottom
C142 "47uF/25V" CAP_C_3225X80 12.319,37.084 r180 bottom
C143 "47uF/25V" CAP_C_3225X80 7.239,37.084 r0 bottom
C144 "1uF/20V" CAP_C_1005X60#1 7.239,33.528 r0 bottom
C145 "2.2nF/10V" CAP_C_1005X60#1 12.838,34.806 r180 top
C146 "2.2nF/10V" CAP_C_1005X60#1 12.838,31.758 r180 top
C147 "10uF/20V" CAP_C_2012X110 17.686,70.361 r0 bottom
C148 "47uF/25V" CAP_C_3225X80 17.711,73.589 r0 bottom
C149 "47uF/25V" CAP_C_3225X80 22.791,73.589 r180 bottom
C150 "4.7uF/10V" CAP_C_1005X60#2 56.965,49.614 r180 top
C151 "0.1uF/10V" cap_c_0201 60.757,48.692 r0 top
C152 "0.1uF/10V" cap_c_0201 60.072,48.047 r180 top
C153 "0.1uF/10V" CAP_C_1005X60#1 25.146,146.05 r270 top
C154 "0.1uF/10V" CAP_C_1005X60#1 166.878,8.255 r180 top
C155 "0.1uF/10V" CAP_C_1005X60#1 2.921,149.352 r270 top
C156 "0.1uF/10V" CAP_C_1005X60#1 83.972,146.549 r90 top
C157 "0.1uF/10V" CAP_C_1005X60#1 62.941,146.803 r90 top
C158 "0.01uF/16V" CAP_C_1005X60#1 21.971,49.767 r0 top
C159 "47uF/25V" CAP_C_3225X80 19.939,42.02 r0 bottom
C160 "0.1uF/10V" CAP_C_1005X60#2 125.222,54.864 r270 bottom
C161 "1uF/20V" CAP_C_1005X60#1 19.939,57.912 r0 bottom
C162 "47uF/25V" CAP_C_3225X80 12.319,42.045 r180 bottom
C163 "47uF/25V" CAP_C_3225X80 12.319,46.355 r180 bottom
C164 "47uF/25V" CAP_C_3225X80 7.239,46.355 r0 bottom
C165 "1uF/20V" CAP_C_1005X60#1 7.239,42.799 r0 bottom
C166 "2.2nF/10V" CAP_C_1005X60#1 12.838,44.077 r180 top
C167 "2.2nF/10V" CAP_C_1005X60#1 12.838,41.029 r180 top
C168 "47uF/25V" CAP_C_3225X80 12.403,56.356 r180 bottom
C169 "47uF/25V" CAP_C_3225X80 7.323,56.356 r0 bottom
C170 "1uF/20V" CAP_C_1005X60#1 7.334,52.808 r0 bottom
C171 "2.2nF/10V" CAP_C_1005X60#1 12.922,54.078 r180 top
C172 "2.2nF/10V" CAP_C_1005X60#1 12.922,51.03 r180 top
C173 "47uF/25V" CAP_C_3225X80 12.418,66.286 r180 bottom
C174 "47uF/25V" CAP_C_3225X80 7.338,66.286 r0 bottom
C175 "1uF/20V" CAP_C_1005X60#1 7.349,62.738 r0 bottom
C176 "2.2nF/10V" CAP_C_1005X60#1 12.937,64.008 r180 top
C177 "2.2nF/10V" CAP_C_1005X60#1 12.937,60.96 r180 top
C178 "0.1uF/16V" CAP_C_1005X60#2 47.313,97.504 r0 bottom value=33pF
C179 "1uF/25V" CAP_C_1005X60#2 47.313,97.504 r0 top value=33pF
C180 "4.7nF/16V" CAP_C_1005X60#2 45.154,87.217 r270 top value=33pF
C181 "0.1uF/16V" CAP_C_1005X60#2 41.217,97.504 r0 bottom value=33pF
C182 "1uF/25V" CAP_C_1005X60#2 41.217,97.504 r0 top value=33pF
C183 "4.7nF/16V" CAP_C_1005X60#2 39.058,87.217 r270 top value=33pF
C184 "0.1uF/16V" CAP_C_1005X60#2 35.179,97.536 r0 bottom value=33pF
C185 "1uF/25V" CAP_C_1005X60#2 35.179,97.536 r0 top value=33pF
C186 "4.7nF/16V" CAP_C_1005X60#2 33.02,87.249 r270 top value=33pF
C187 "47uF/25V" CAP_C_3225X80 12.319,32.766 r180 bottom
C188 "47uF/25V" CAP_C_3225X80 12.319,42.037 r180 bottom
C189 "47uF/25V" CAP_C_3225X80 12.403,52.046 r180 bottom
C190 "47uF/25V" CAP_C_3225X80 12.418,61.976 r180 bottom
C191 "0.1uF/10V" CAP_C_1005X60#1 40.307,106.925 r90 top
C192 "47uF/25V" CAP_C_3225X80 12.316,27.559 r180 bottom
C193 "47uF/25V" CAP_C_3225X80 7.236,27.559 r0 bottom
C194 "47uF/25V" CAP_C_3225X80 12.308,23.242 r180 bottom
C195 "1uF/20V" CAP_C_1005X60#2 7.247,24.003 r0 bottom
C196 "2.2nF/10V" CAP_C_1005X60#2 12.835,25.281 r180 top
C197 "2.2nF/10V" CAP_C_1005X60#2 12.835,22.233 r180 top
C198 "47uF/25V" CAP_C_3225X80 22.482,18.161 r180 bottom
C199 "47uF/25V" CAP_C_3225X80 17.402,18.161 r0 bottom
C200 "47uF/25V" CAP_C_3225X80 22.482,13.843 r180 bottom
C201 "1uF/20V" CAP_C_1005X60#2 17.399,14.605 r0 bottom
C202 "2.2nF/10V" CAP_C_1005X60#2 23.001,15.883 r180 top
C203 "2.2nF/10V" CAP_C_1005X60#2 23.001,12.835 r180 top
C204 "0.1uF/10V" CAP_C_1005X60#2 196.543,86.512 r90 top
C205 "0.1uF/10V" CAP_C_1005X60#2 203.918,86.512 r90 top
C206 "0.1uF/10V" CAP_C_1005X60#2 181.817,86.512 r90 top
C207 "0.1uF/10V" CAP_C_1005X60#2 189.168,86.512 r90 top
C208 "0.1uF/10V" CAP_C_1005X60#2 115.316,52.578 r180 bottom
C209 "0.1uF/10V" CAP_C_1005X60#2 4.928,123.444 r270 bottom
C210 "0.1uF/10V" CAP_C_1005X60#2 6.502,123.444 r90 bottom
C211 "0.1uF/10V" CAP_C_1005X60#2 6.35,115.951 r90 bottom
C212 "0.1uF/10V" CAP_C_1005X60#2 5.334,115.951 r90 bottom
C213 "150pF/10V" CAP_C_1005X60#2 462.881,61.485 r90 top
C214 "0.1uF/10V" CAP_C_1005X60#2 181.817,111.563 r90 top
C215 "150pF/10V" CAP_C_1005X60#2 435.955,61.485 r90 top
C216 "150pF/10V" CAP_C_1005X60#2 428.829,61.485 r90 top
C217 "150pF/10V" CAP_C_1005X60#2 421.729,61.485 r90 top
C218 "150pF/10V" CAP_C_1005X60#2 414.604,61.485 r90 top
C219 "150pF/10V" CAP_C_1005X60#2 407.503,61.485 r90 top
C220 "150pF/10V" CAP_C_1005X60#2 392.752,61.485 r90 top
C221 "150pF/10V" CAP_C_1005X60#2 346.75,61.485 r90 top
C222 "0.1uF/10V" CAP_C_1005X60#2 304.848,61.485 r90 top
C223 "150pF/10V" CAP_C_1005X60#2 297.473,61.485 r90 top
C224 "0.1uF/10V" CAP_C_1005X60#2 290.097,61.485 r90 top
C225 "150pF/10V" CAP_C_1005X60#2 282.722,61.485 r90 top
C226 "150pF/10V" CAP_C_1005X60#2 275.372,61.485 r90 top
C227 "150pF/10V" CAP_C_1005X60#2 267.996,61.485 r90 top
C228 "150pF/10V" CAP_C_1005X60#2 255.246,61.485 r90 top
C229 "150pF/10V" CAP_C_1005X60#2 221.969,61.485 r90 top
C230 "150pF/10V" CAP_C_1005X60#2 214.594,61.485 r90 top
C231 "150pF/10V" CAP_C_1005X60#2 193.243,61.485 r90 top
C232 "0.1uF/10V" cap_c_0201 58.721,48.868 r180 top
C233 "0.1uF/10V" cap_c_0201 57.163,50.208 r180 top
C234 "0.1uF/10V" cap_c_0201 57.444,48.636 r180 top
C235 "0.1uF/10V" cap_c_0201 59.766,50.698 r90 top
C236 "0.1uF/10V" cap_c_0201 61.712,50.687 r90 top
C237 "0.1uF/10V" cap_c_0201 62.357,48.689 r90 top
C238 "0.1uF/10V" cap_c_0201 62.357,40.234 r270 top
C239 "0.1uF/10V" cap_c_0201 59.367,43.164 r180 top
C240 "0.1uF/10V" cap_c_0201 59.367,45.752 r180 top
C241 "0.1uF/10V" cap_c_0201 63.662,50.698 r90 top
C242 "0.1uF/10V" cap_c_0201 57.455,46.406 r180 top
C243 "0.1uF/10V" cap_c_0201 61.712,38.224 r270 top
C244 "4.7uF/10V" CAP_C_1005X60#2 59.112,37.819 r270 top
C245 "0.1uF/10V" cap_c_0201 69.895,44.462 r0 top
C246 "0.1uF/10V" cap_c_0201 66.587,48.037 r90 top
C247 "0.1uF/10V" cap_c_0201 60.743,41.537 r270 top
C248 "0.1uF/10V" cap_c_0201 60.737,40.237 r0 top
C249 "0.1uF/10V" cap_c_0201 64.964,48.789 r90 top
C250 "0.1uF/10V" cap_c_0201 64.901,46.352 r90 top
C251 "0.1uF/10V" cap_c_0201 57.429,42.494 r180 top
C252 "0.1uF/10V" cap_c_0201 60.987,47.056 r270 top
C253 "0.1uF/10V" cap_c_0201 59.766,38.252 r270 top
C254 "0.1uF/10V" cap_c_0201 57.15,38.65 r180 top
C255 "0.1uF/10V" cap_c_0201 57.402,40.288 r180 top
C256 "0.1uF/10V" cap_c_0201 59.01,40.562 r90 top
C257 "0.1uF/10V" cap_c_0201 57.429,44.475 r180 top
C258 "0.1uF/10V" cap_c_0201 61.417,42.824 r180 top
C259 "0.1uF/10V" cap_c_0201 61.712,45.727 r180 top
C260 "4.7uF/10V" CAP_C_1005X60#2 57.162,37.562 r180 top
C261 "4.7uF/10V" CAP_C_1005X60#2 69.184,51.046 r90 top
C262 "0.1uF/10V" cap_c_0201 65.938,46.965 r0 top
C263 "0.1uF/10V" cap_c_0201 67.562,50.687 r90 top
C264 "0.1uF/10V" cap_c_0201 69.926,48.362 r0 top
C265 "18pF/10V" CAP_C_0201 31.496,187.198 r270 top
C266 "0.1uF/10V" cap_c_0201 65.608,50.698 r90 top
C267 "0.1uF/10V" cap_c_0201 15.113,188.849 r90 top
C268 "0.1uF/10V" cap_c_0201 70.212,50.948 r90 top
C269 "0.1uF/10V" cap_c_0201 66.913,46.334 r180 top
C270 "0.1uF/10V" cap_c_0201 60.087,41.537 r90 top
C271 "2.2uF/10V" cap_c_0201 67.933,45.762 r0 top
C272 "18pF/10V" CAP_C_0201 29.845,187.198 r270 top
C273 "0.1uF/10V" cap_c_0201 12.943,88.943 r90 top
C274 "4.7uF/10V" CAP_C_1005X60#2 8.857,99.575 r90 top
C275 "0.1uF/10V" cap_c_0201 10.027,88.943 r90 top
C276 "20pF/10V" CAP_C_0201 23.749,179.07 r270 top
C277 "0.1uF/10V" cap_c_0201 67.234,48.031 r270 top
C278 "0.1uF/10V" cap_c_0201 67.887,48.031 r270 top
C279 "0.1uF/10V" cap_c_0201 20.066,198.628 r90 top
C280 "20pF/10V" CAP_C_0201 20.701,176.53 r0 top
C281 "4.7uF/10V" cap_c_0201 109.939,202.171 r90 top
C282 "22uF/10V" cap_c_0201 108.481,202.171 r90 top
C283 "4.7uF/10V" CAP_C_1608X80#2 102.39,199.65 r0 top
C284 "4.7uF/10V" CAP_C_1608X80#2 101.728,201.771 r90 top
C285 "0.1uF/10V" cap_c_0201 130.928,199.938 r0 top
C286 "0.1uF/10V" cap_c_0201 114.313,202.171 r90 top
C287 "4.7uF/10V" cap_c_0201 115.771,202.171 r90 top
C288 "22uF/10V" cap_c_0201 111.397,202.171 r90 top
C289 "4.7uF/10V" cap_c_0201 112.855,202.171 r90 top
C290 "22uF/10V" cap_c_0201 128.893,202.171 r90 top
C291 "4.7uF/10V" cap_c_0201 139.099,202.171 r90 top
C292 "22uF/10V" cap_c_0201 137.641,202.171 r90 top
C293 "4.7uF/10V" cap_c_0201 136.183,202.171 r90 top
C294 "4.7uF/10V" cap_c_0201 140.557,202.171 r90 top
C295 "4.7uF/10V" cap_c_0201 131.809,202.171 r90 top
C296 "4.7uF/10V" cap_c_0201 130.351,202.171 r90 top
C297 "4.7uF/10V" cap_c_0201 134.725,202.171 r90 top
C298 "4.7uF/10V" cap_c_0201 133.267,202.171 r90 top
C299 "0.1uF/10V" cap_c_0201 181.592,39.484 r90 top
C300 "0.1uF/10V" cap_c_0201 188.942,39.484 r90 top
C301 "4.7uF/10V" CAP_C_1005X60#2 76.985,22.068 r180 top
C302 "0.1uF/10V" CAP_C_0201 76.593,21.25 r180 top
C303 "0.1uF/10V" CAP_C_0201 81.052,23.27 r0 top
C304 "0.1uF/10V" CAP_C_0201 80.505,25.273 r180 top
C305 "0.1uF/10V" CAP_C_0201 80.318,28.068 r90 top
C306 "0.1uF/10V" CAP_C_0201 76.262,27.262 r180 top
C307 "0.1uF/10V" CAP_C_0201 82.876,32.47 r270 top
C308 "0.1uF/10V" CAP_C_0201 74.445,32.47 r270 top
C309 "0.1uF/10V" CAP_C_0201 82.876,30.858 r270 top
C310 "0.1uF/10V" CAP_C_0201 74.489,30.858 r270 top
C311 "0.1uF/10V" CAP_C_0201 74.431,21.271 r270 top
C312 "0.1uF/10V" CAP_C_0201 81.459,20.651 r180 top
C313 "0.1uF/10V" CAP_C_0201 74.473,22.848 r270 top
C314 "0.1uF/10V" CAP_C_0201 82.061,22.068 r90 top
C315 "0.1uF/10V" CAP_C_0201 75.865,23.667 r270 top
C316 "0.1uF/10V" CAP_C_0201 82.061,24.463 r270 top
C317 "0.1uF/10V" CAP_C_0201 74.489,24.447 r90 top
C318 "0.1uF/10V" CAP_C_0201 75.865,25.248 r90 top
C319 "0.1uF/10V" CAP_C_0201 82.069,26.063 r90 top
C320 "4.7uF/10V" CAP_C_1005X60#2 87.935,33.96 r90 top
C321 "0.1uF/10V" CAP_C_0201 74.458,25.925 r270 top
C322 "0.1uF/10V" CAP_C_0201 67.92,43.155 r0 top
C323 "0.1uF/10V" CAP_C_0201 67.31,40.894 r270 top
C324 "0.1uF/10V" CAP_C_0201 67.894,40.894 r90 top
C325 "0.1uF/10V" CAP_C_0201 65.608,37.839 r270 top
C326 "0.1uF/10V" CAP_C_0201 66.576,41.51 r0 top
C327 "0.1uF/10V" CAP_C_0201 70.188,42.512 r0 top
C328 "0.1uF/10V" CAP_C_0201 69.426,37.968 r270 top
C329 "0.1uF/10V" CAP_C_0201 90.976,30.668 r90 top
C330 "0.1uF/10V" CAP_C_0201 67.562,37.907 r90 top
C331 "0.1uF/10V" CAP_C_0201 63.348,44.171 r90 top
C332 "0.1uF/10V" CAP_C_0201 64.364,44.475 r90 top
C333 "4.7uF/10V" CAP_C_1608X80#2 284.772,5.758 r90 top
C334 "0.1uF/10V" CAP_C_0201 70.326,40.562 r0 top
C335 "0.1uF/10V" CAP_C_0201 62.675,42.19 r0 top
C336 "0.1uF/10V" CAP_C_0201 66.188,40.562 r270 top
C337 "0.1uF/10V" CAP_C_0201 90.176,30.668 r90 top
C338 "0.1uF/10V" CAP_C_0201 64.637,40.237 r270 top
C339 "0.1uF/10V" CAP_C_0201 65.938,42.904 r270 top
C340 "4.7uF/10V" CAP_C_1608X80#2 37.058,51.205 r90 top
C341 "0.1uF/10V" CAP_C_0201 82.193,29.249 r0 top
C342 "0.1uF/10V" CAP_C_0201 90.976,29.368 r90 top
D1 "SS54" DO-214AC_SMA 10.16,18.415 r0 top
D2 "SS54" DO-214AC_SMA 19.939,29.845 r180 bottom
D3 "USBLC6-2SC6" SOT95P280X145-6N 36.921,69.286 r90 top
D4 "USBLC6-2SC6" SOT95P280X145-6N 49.875,69.286 r90 top
D5 "1N4007FL" SOD3717X145N 57.531,10.922 r270 bottom value=1N5007
D6 "1N4007FL" SOD3717X145N 76.708,10.922 r270 bottom value=1N5007
D7 "1N4007FL" SOD3717X145N 83.82,10.922 r270 bottom value=1N5007
D8 "1N4007FL" SOD3717X145N 87.376,10.922 r270 bottom value=1N5007
D9 "1N4007FL" SOD3717X145N 61.087,10.922 r270 bottom value=1N5007
D10 "1N4007FL" SOD3717X145N 80.264,10.922 r270 bottom value=1N5007
D11 "1N4007FL" SOD3717X145N 64.643,10.922 r270 bottom value=1N5007
D12 "1N4007FL" SOD3717X145N 68.199,10.922 r270 bottom value=1N5007
D13 "SS54" DO-214AC_SMA 10.287,37.338 r0 top
D14 "SS54" DO-214AC_SMA 19.939,49.513 r180 bottom
D15 "SS54" DO-214AC_SMA 10.287,46.609 r0 top
D16 "SS54" DO-214AC_SMA 10.371,56.61 r0 top
D17 "SS54" DO-214AC_SMA 10.386,66.54 r0 top
D18 "SS54" DO-214AC_SMA 10.284,27.813 r0 top
D19 "SS54" DO-214AC_SMA 20.45,18.415 r0 top
D20 "1N4007FL" SOD3717X145N 92.887,65.405 r0 bottom value=1N5007
D21 "1N4007FL" SOD3717X145N 98.153,65.532 r0 bottom value=1N5007
D22 "1N4007FL" SOD3717X145N 103.42,65.532 r0 bottom value=1N5007
D23 "1N4007FL" SOD3717X145N 108.686,65.532 r0 bottom value=1N5007
D24 "1N4007FL" SOD3717X145N 113.952,65.516 r0 bottom value=1N5007
D25 "1N4007FL" SOD3717X145N 119.218,65.532 r0 bottom value=1N5007
D26 "1N4007FL" SOD3717X145N 124.485,65.532 r0 bottom value=1N5007
D27 "1N4007FL" SOD3717X145N 129.751,65.405 r0 bottom value=1N5007
D28 "1N4007FL" SOD3717X145N 156.082,65.43 r0 bottom value=1N5007
D29 "1N4007FL" SOD3717X145N 161.348,65.43 r0 bottom value=1N5007
D30 "1N4007FL" SOD3717X145N 166.615,65.43 r0 bottom value=1N5007
D31 "1N4007FL" SOD3717X145N 171.881,65.43 r0 bottom value=1N5007
D32 "1N4007FL" SOD3717X145N 135.017,65.43 r0 bottom value=1N5007
D33 "1N4007FL" SOD3717X145N 140.283,65.532 r0 bottom value=1N5007
D34 "1N4007FL" SOD3717X145N 145.55,65.43 r0 bottom value=1N5007
D35 "1N4007FL" SOD3717X145N 150.816,65.43 r0 bottom value=1N5007
DS1 "_LED_RED" LED_0402 1.953,24.639 r270 top
DS2 "_LED_YELLOW_4" LED_0402 1.953,19.737 r270 top
DS3 "_LED_RED" LED_0402 1.953,9.934 r270 top
DS4 "_LED_YELLOW_4" LED_0402 1.953,30.254 r270 top
DS5 "_LED_RED" LED_0402 1.953,55.631 r270 top
DS6 "_LED_RED" LED_0402 1.953,14.836 r270 top
DS7 "_LED_RED" LED_0402 1.953,45.068 r270 top
DS8 "_LED_RED" LED_0402 1.953,35.192 r270 top
DS9 "_LED_RED" LED_0402 1.994,50.568 r270 top
DS10 "_LED_RED" LED_0402 1.953,40.13 r270 top
DS11 "BLUE" LED-0603-BLUE 456.831,63.41 r90 top value="LED 3 - 5 ly 2 Colour"
DS12 "GREEN" LED-0603-BLUE 219.219,37.959 r90 top value="LED 3 - 5 ly 2 Colour"
DS13 "BLUE" LED-0603-BLUE 226.319,37.959 r90 top value="LED 3 - 5 ly 2 Colour"
DZ1 "KDZLVTFTR51" SOD3717X145N 92.837,68.326 r180 bottom
DZ2 "KDZLVTFTR51" SOD3717X145N 98.103,68.453 r180 bottom
DZ3 "KDZLVTFTR51" SOD3717X145N 103.37,68.453 r180 bottom
DZ4 "KDZLVTFTR51" SOD3717X145N 108.636,68.453 r180 bottom
DZ5 "KDZLVTFTR51" SOD3717X145N 113.902,68.437 r180 bottom
DZ6 "KDZLVTFTR51" SOD3717X145N 119.168,68.453 r180 bottom
DZ7 "KDZLVTFTR51" SOD3717X145N 124.435,68.453 r180 bottom
DZ8 "KDZLVTFTR51" SOD3717X145N 129.701,68.326 r180 bottom
DZ9 "KDZLVTFTR51" SOD3717X145N 156.032,68.351 r180 bottom
DZ10 "KDZLVTFTR51" SOD3717X145N 161.298,68.351 r180 bottom
DZ11 "KDZLVTFTR51" SOD3717X145N 166.565,68.351 r180 bottom
DZ12 "KDZLVTFTR51" SOD3717X145N 171.831,68.351 r180 bottom
DZ13 "KDZLVTFTR51" SOD3717X145N 134.967,68.351 r180 bottom
DZ14 "KDZLVTFTR51" SOD3717X145N 140.233,68.453 r180 bottom
DZ15 "KDZLVTFTR51" SOD3717X145N 145.5,68.351 r180 bottom
DZ16 "KDZLVTFTR51" SOD3717X145N 150.766,68.351 r180 bottom
H3 "M3" HEX-M3_NoVia 4,76 r0 top
H4 "M3" HEX-M3_NoVia 4,4 r0 top
H7 "M3" HEX-M3_NoVia 176,76 r0 top
H8 "M3" HEX-M3_NoVia 176,4 r0 top
J1 "5040500991" MOLEX_5040500991 18.034,4 r180 top
J2 "5040500891" MOLEX_5040500891 18.07,5.004 r0 bottom
J3 "Header 8x1" Header_254P_8x1 167.386,18.669 r0 top
J4 "0533980571" MOLEX_0532610571 36.87,75.298 r180 top
J5 "0533980571" MOLEX_0532610571 49.824,75.298 r180 top
J6 "5040500891" MOLEX_5040500891 139.446,4.172 r180 top
J7 "5040500891" MOLEX_5040500891 62.822,4.172 r180 top
J8 "5040500891" MOLEX_5040500891 82.061,4.172 r180 top
J9 "5040500891" MOLEX_5040500891 101.43,4.172 r180 top
J10 "5040500891" MOLEX_5040500891 120.48,4.172 r180 top
J11 "5040500891" MOLEX_5040500891 162.306,74.93 r0 top
J12 "5040500891" MOLEX_5040500891 143.783,74.896 r0 top
J13 "0533980671" MOLEX_0532610671 120.446,4.625 r180 bottom
J14 "0533980671" MOLEX_0532610671 135.106,4.625 r180 bottom
J15 "0533980471" MOLEX_0532610471 155.595,3.66 r0 top
J16 "0473460001" 47346-0001_MOL 33.662,2.24 r0 top
J17 "Molex_1051620001" Molex_1051620001 46.316,13.678 r0 top
J18 "0533980471" MOLEX_0532610471 72.517,3.793 r180 bottom
J19 "0533980471" MOLEX_0532610471 97.79,3.793 r180 bottom
J20 "5040500891" MOLEX_5040500891 125.241,74.896 r0 top
J21 "0533980971" MOLEX_0532610971 86.303,75.319 r180 top
J22 "0533980971" MOLEX_0532610971 66.04,76.2 r0 bottom
J23 "0533981171" MOLEX_0532611171 66.902,75.298 r180 top
J24 "0533981171" MOLEX_0532611171 105.711,75.298 r180 top
J25 "Header 8x1" Header_254P_8x1 321.674,29.784 r90 top
J26 "Header 2x1_2M" MOLEX_0532610271 166.878,3.66 r0 top
J27 "0533980671" MOLEX_0532610671 149.765,4.625 r180 bottom
J28 "0533980671" MOLEX_0532610671 164.425,4.625 r180 bottom
J29 "5040500891" MOLEX_5040500891 104.541,74.896 r180 bottom
J30 "5040500891" MOLEX_5040500891 123.118,74.896 r180 bottom
J31 "5040500291" MOLEX_5040500291 81.407,74.803 r180 bottom
J32 "5040500891" MOLEX_5040500891 141.696,74.896 r180 bottom
J33 "5040500891" MOLEX_5040500891 160.274,75.006 r180 bottom
JP1 "DNP/0R" JUMPER_1608 7.112,13.335 r0 bottom
JP2 "DNP/0R" JUMPER_1608 30.988,7.112 r180 top
JP3 "DNP/0R" JUMPER_1608 7.25,32.012 r0 bottom
JP4 "0R" JUMPER_1608 80.781,146.149 r90 top
JP5 "DNP/0R" JUMPER_1608 7.25,41.275 r0 bottom
JP6 "DNP/0R" JUMPER_1608 7.334,51.284 r0 bottom
JP7 "DNP/0R" JUMPER_1608 7.349,59.436 r180 bottom
JP8 "DNP/0R" JUMPER_1608 10.397,59.436 r0 bottom
JP9 "DNP/0R" JUMPER_1608 7.349,61.214 r0 bottom
JP10 "DNP/0R" JUMPER_1608 7.247,22.487 r0 bottom
JP11 "DNP/0R" JUMPER_1608 17.413,13.089 r0 bottom
L1 "SRP7050TA-220M" PSM6050 19.939,35.306 r0 top
L2 "1uH" L-SMD-M-3.5x3.5x2mm 137.033,11.576 r90 top
L3 "1uH" L-SMD-M-3.5x3.5x2mm 147.574,11.576 r90 top
L4 "1uH" L-SMD-M-3.5x3.5x2mm 137.033,21.082 r90 top
L5 "1uH" L-SMD-M-3.5x3.5x2mm 147.574,21.082 r90 top
L6 "SRP7050TA-220M" PSM6050 19.939,54.974 r0 top
L7 "Inductor" IND_C_1008 135.104,208.354 r0 top value=1.5uH
L8 "Inductor" IND_C_1008 139.012,208.354 r0 top value=1.5uH
L9 "Inductor" IND_C_1008 131.196,208.354 r0 top value=1.5uH
L10 "Inductor" IND_C_1008 127.288,208.354 r180 top value=1.5uH
Q1 "DMG302PU-7" SOT95P240X120-3N 36.921,69.286 r270 bottom
Q2 "DMG302PU-7" SOT95P240X120-3N 49.875,69.286 r270 bottom
Q3 "AO3400A" SOT95P240X120-3N 57.531,10.922 r270 top
Q4 "AO3400A" SOT95P240X120-3N 76.708,10.922 r270 top
Q5 "AO3400A" SOT95P240X120-3N 83.82,10.922 r270 top
Q6 "AO3400A" SOT95P240X120-3N 87.376,10.922 r270 top
Q7 "AO3400A" SOT95P240X120-3N 61.087,10.922 r270 top
Q8 "AO3400A" SOT95P240X120-3N 80.264,10.922 r270 top
Q9 "AO3400A" SOT95P240X120-3N 64.643,10.922 r270 top
Q10 "AO3400A" SOT95P240X120-3N 68.199,10.922 r270 top
Q11 "AO3400A" SOT95P240X120-3N 92.964,67.691 r90 top
Q12 "AO3400A" SOT95P240X120-3N 98.23,67.818 r90 top
Q13 "AO3400A" SOT95P240X120-3N 103.497,67.818 r90 top
Q14 "AO3400A" SOT95P240X120-3N 108.763,67.818 r90 top
Q15 "AO3400A" SOT95P240X120-3N 114.029,67.802 r90 top
Q16 "AO3400A" SOT95P240X120-3N 119.295,67.818 r90 top
Q17 "AO3400A" SOT95P240X120-3N 124.562,67.818 r90 top
Q18 "AO3400A" SOT95P240X120-3N 129.828,67.691 r90 top
Q19 "AO3400A" SOT95P240X120-3N 156.159,67.716 r90 top
Q20 "AO3400A" SOT95P240X120-3N 161.425,67.716 r90 top
Q21 "AO3400A" SOT95P240X120-3N 166.692,67.716 r90 top
Q22 "AO3400A" SOT95P240X120-3N 171.958,67.716 r90 top
Q23 "AO3400A" SOT95P240X120-3N 135.094,67.716 r90 top
Q24 "AO3400A" SOT95P240X120-3N 140.36,67.818 r90 top
Q25 "AO3400A" SOT95P240X120-3N 145.627,67.716 r90 top
Q26 "AO3400A" SOT95P240X120-3N 150.893,67.716 r90 top
Q27 "Transistor MOS-N GSD" SOT-23-3 123.355,207.879 r90 top value=BSS138N
R1 "470k" RES_C_1005X40#1 7.123,15.883 r180 top
R2 "47k" RES_C_1005X40#1 7.123,12.835 r180 top
R3 "47k" RES_C_1005X40#1 7.123,11.819 r180 top
R4 "10k" RES_C_1005X40#1 7.123,14.867 r180 top
R5 "47k" RES_C_1005X40#1 7.123,13.851 r0 top
R6 "1.6k" RES_C_1005X40#1 12.711,14.867 r180 top
R7 "10k" RES_C_1005X40#1 19.939,30.099 r0 top
R8 "2.2k" RES_C_1005X40#1 1.866,27.09 r270 top
R9 "1k" RES_C_1005X40#1 1.866,22.188 r270 top
R10 "3.24k" RES_C_1005X40#1 17.907,30.099 r0 top
R11 "22R" RES_C_1005X40#1 94.361,42.164 r180 bottom
R12 "22R" RES_C_1005X40#1 123.444,43.053 r180 bottom
R13 "22R" RES_C_1005X40#1 94.361,39.497 r180 bottom
R14 "22R" RES_C_1005X40#1 114.681,48.133 r270 bottom
R15 "22R" RES_C_1005X40#1 94.361,35.941 r180 bottom
R16 "22R" RES_C_1005X40#1 113.792,48.133 r270 bottom
R17 "22R" RES_C_1005X40#1 94.361,34.163 r180 bottom
R18 "22R" RES_C_1005X40#2 475.831,61.485 r90 top
R18 "22R" RES_C_1005X40#1 94.361,26.162 r180 bottom
R19 "22R" RES_C_1005X40#1 110.236,48.133 r270 bottom
R20 "22R" RES_C_1005X40#1 94.361,22.606 r180 bottom
R21 "22R" RES_C_1005X40#1 109.347,48.133 r270 bottom
R22 "22R" RES_C_1005X40#1 102.235,48.133 r90 bottom
R23 "22R" RES_C_1005X40#1 106.68,48.133 r270 bottom
R24 "22R" RES_C_1005X40#1 94.361,24.384 r180 bottom
R25 "22R" RES_C_1005X40#2 470.006,61.485 r90 top
R25 "22R" RES_C_1005X40#1 99.568,48.133 r270 bottom
R26 "22R" RES_C_1005X40#2 450.43,61.485 r90 top
R26 "22R" RES_C_1005X40#1 100.457,19.177 r270 bottom
R27 "22R" RES_C_1005X40#1 94.361,41.275 r0 bottom
R28 "22R" RES_C_1005X40#1 102.235,19.177 r270 bottom
R29 "22R" RES_C_1005X40#1 94.361,38.608 r0 bottom
R30 "22R" RES_C_1005X40#1 98.679,19.177 r270 bottom
R31 "22R" RES_C_1005X40#1 94.378,35.052 r0 bottom
R32 "22R" RES_C_1005X40#1 118.237,19.177 r270 bottom
R33 "22R" RES_C_1005X40#1 94.361,31.496 r0 bottom
R34 "22R" RES_C_1005X40#1 112.903,19.177 r270 bottom
R35 "22R" RES_C_1005X40#1 94.361,28.829 r0 bottom
R36 "22R" RES_C_1005X40#1 113.792,19.177 r270 bottom
R37 "22R" RES_C_1005X40#1 117.348,19.177 r270 bottom
R38 "22R" RES_C_1005X40#1 123.444,30.226 r0 bottom
R39 "22R" RES_C_1005X40#1 94.361,23.495 r0 bottom
R40 "22R" RES_C_1005X40#1 97.79,19.177 r90 bottom
R41 "22R" RES_C_1005X40#1 99.568,19.177 r270 bottom
R42 "22R" RES_C_1005X40#1 101.346,19.177 r90 bottom
R43 "22R" RES_C_1005X40#1 103.124,19.177 r90 bottom
R44 "22R" RES_C_1005X40#1 122.682,19.177 r270 bottom
R45 "22R" RES_C_1005X40#1 104.902,19.177 r90 bottom
R46 "22R" RES_C_1005X40#1 116.459,19.177 r270 bottom
R47 "22R" RES_C_1005X40#1 108.458,19.177 r270 bottom
R48 "22R" RES_C_1005X40#1 105.791,19.177 r270 bottom
R49 "22R" RES_C_1005X40#1 112.014,19.177 r90 bottom
R50 "22R" RES_C_1005X40#1 104.013,19.177 r270 bottom
R51 "22R" RES_C_1005X40#1 111.125,19.177 r90 bottom
R52 "22R" RES_C_1005X40#1 96.901,19.177 r270 bottom
R53 "22R" RES_C_1005X40#1 115.57,19.177 r90 bottom
R54 "22R" RES_C_1005X40#1 101.346,48.133 r90 bottom
R55 "22R" RES_C_1005X40#1 96.012,19.177 r90 bottom
R56 "22R" RES_C_1005X40#1 112.014,48.133 r90 bottom
R57 "22R" RES_C_1005X40#1 94.361,44.831 r180 bottom
R58 "22R" RES_C_1005X40#1 103.124,48.133 r90 bottom
R59 "22R" RES_C_1005X40#1 104.902,48.133 r90 bottom
R60 "22R" RES_C_1005X40#1 123.444,42.164 r180 bottom
R61 "10k" RES_C_1005X40#2 387.427,61.485 r90 top
R62 "22R" RES_C_1005X40#2 361.001,61.485 r90 top
R63 "0R" RES_C_1005X40#2 366.826,61.485 r90 top
R64 "22R" RES_C_1005X40#1 121.793,19.177 r270 bottom
R65 "22R" RES_C_1005X40#1 123.444,40.894 r180 bottom
R66 "22R" RES_C_1005X40#1 120.904,19.177 r270 bottom
R67 "22R" RES_C_1005X40#1 123.444,40.005 r180 bottom
R68 "22R" RES_C_1005X40#1 120.015,19.177 r270 bottom
R69 "22R" RES_C_1005X40#1 119.126,19.177 r270 bottom
R70 "22R" RES_C_1005X40#1 106.68,19.177 r270 bottom
R71 "22R" RES_C_1005X40#1 110.236,19.177 r270 bottom
R72 "22R" RES_C_1005X40#1 114.681,19.177 r270 bottom
R73 "22R" RES_C_1005X40#1 123.444,31.115 r180 bottom
R74 "22R" RES_C_1005X40#1 94.361,27.94 r180 bottom
R75 "22R" RES_C_1005X40#1 123.444,32.004 r180 bottom
R76 "22R" RES_C_1005X40#1 94.361,29.718 r180 bottom
R77 "22R" RES_C_1005X40#1 123.444,29.337 r180 bottom
R78 "22R" RES_C_1005X40#1 94.361,33.274 r180 bottom
R79 "22R" RES_C_1005X40#1 123.444,27.94 r180 bottom
R80 "22R" RES_C_1005X40#1 94.361,36.83 r180 bottom
R81 "22R" RES_C_1005X40#1 94.361,43.942 r0 bottom
R82 "22R" RES_C_1005X40#1 123.444,34.671 r0 bottom
R83 "DNP/22R" RES_C_1005X40#1 97.79,48.133 r270 bottom
R84 "22R" RES_C_1005X40#1 123.444,32.893 r0 bottom
R85 "22R" RES_C_1005X40#1 94.361,27.051 r0 bottom
R86 "22R" RES_C_1005X40#1 98.679,48.133 r270 bottom
R87 "22R" RES_C_1005X40#1 94.361,37.719 r180 bottom
R88 "22R" RES_C_1005X40#1 94.361,32.385 r0 bottom
R89 "22R" RES_C_1005X40#1 123.444,33.782 r0 bottom
R90 "22R" RES_C_1005X40#1 117.348,48.133 r270 bottom
R91 "22R" RES_C_1005X40#1 94.361,40.386 r180 bottom
R92 "22R" RES_C_1005X40#1 118.237,48.133 r270 bottom
R93 "22R" RES_C_1005X40#1 94.361,43.053 r180 bottom
R94 "22R" RES_C_1005X40#1 94.361,30.607 r0 bottom
R95 "22R" RES_C_1005X40#1 100.457,48.133 r90 bottom
R96 "22R" RES_C_1005X40#1 119.126,48.133 r270 bottom
R97 "22R" RES_C_1005X40#1 104.013,48.133 r90 bottom
R98 "22R" RES_C_1005X40#1 105.791,48.133 r90 bottom
R99 "22R" RES_C_1005X40#1 107.569,48.133 r90 bottom
R100 "22R" RES_C_1005X40#1 108.458,48.133 r90 bottom
R101 "22R" RES_C_1005X40#1 111.125,48.133 r90 bottom
R102 "22R" RES_C_1005X40#1 112.903,48.133 r90 bottom
R103 "22R" RES_C_1005X40#1 123.444,38.227 r0 bottom
R104 "22R" RES_C_1005X40#1 123.444,39.116 r0 bottom
R105 "22R" RES_C_1005X40#1 94.361,25.273 r180 bottom
R106 "22R" RES_C_1005X40#1 123.444,35.56 r0 bottom
R107 "22R" RES_C_1005X40#1 123.444,36.449 r0 bottom
R108 "22R" RES_C_1005X40#1 123.444,37.338 r0 bottom
R109 "10M" RES_C_1005X40#2 207.493,61.485 r90 top
R110 "5.62k" RES_C_1005X40#1 116.459,48.133 r270 bottom
R111 "10k" RES_C_1005X40#1 110.788,145.914 r90 top
R112 "10k" RES_C_1005X40#1 39.37,69.342 r90 bottom
R113 "10k" RES_C_1005X40#1 39.37,69.342 r90 top
R114 "100R" RES_C_1005X40#1 34.544,69.342 r90 top
R115 "10k" RES_C_1005X40#1 52.016,62.98 r270 top
R116 "10k" RES_C_1005X40#1 52.016,65.012 r90 top
R117 "10k" RES_C_1005X40#1 52.324,69.342 r90 bottom
R118 "10k" RES_C_1005X40#1 52.324,69.342 r90 top
R119 "100R" RES_C_1005X40#1 47.498,69.342 r90 top
R120 "DNP/0R" RES_C_1005X40#1 116.62,145.914 r90 top
R121 "DNP/0R" RES_C_1005X40#1 119.536,145.914 r90 top
R122 "10k" RES_C_1005X40#1 122.452,145.914 r90 top
R123 "10k" RES_C_1005X40#1 120.994,145.914 r90 top
R124 "10k" RES_C_1005X40#1 139.576,18.013 r180 top
R125 "10k" RES_C_1005X40#1 150.117,18.013 r180 top
R126 "22R" RES_C_1005X40#1 107.569,19.177 r90 bottom
R127 "22R" RES_C_1005X40#1 109.347,19.177 r90 bottom
R128 "DNP/10k" RES_C_1005X40#1 7.247,25.281 r0 bottom
R129 "470k" RES_C_1005X40#1 7.236,24.257 r180 top
R130 "10k" RES_C_1005X40#1 141.605,16.275 r0 top